# Altium PCB OpenPack_BATMOD_V2p0.PcbDoc (part 1 of 2)
Units mm, origin at the board's own origin, x right, y up, seen from the top; angles counter-clockwise.
Board outline 140 x 94 mm, 4 copper layers (Top Layer, Mid Layer 1, Mid Layer 2, Bottom Layer), stack 1.57 mm thick; 239 components, 147 nets, 762 pads, 455 vias.
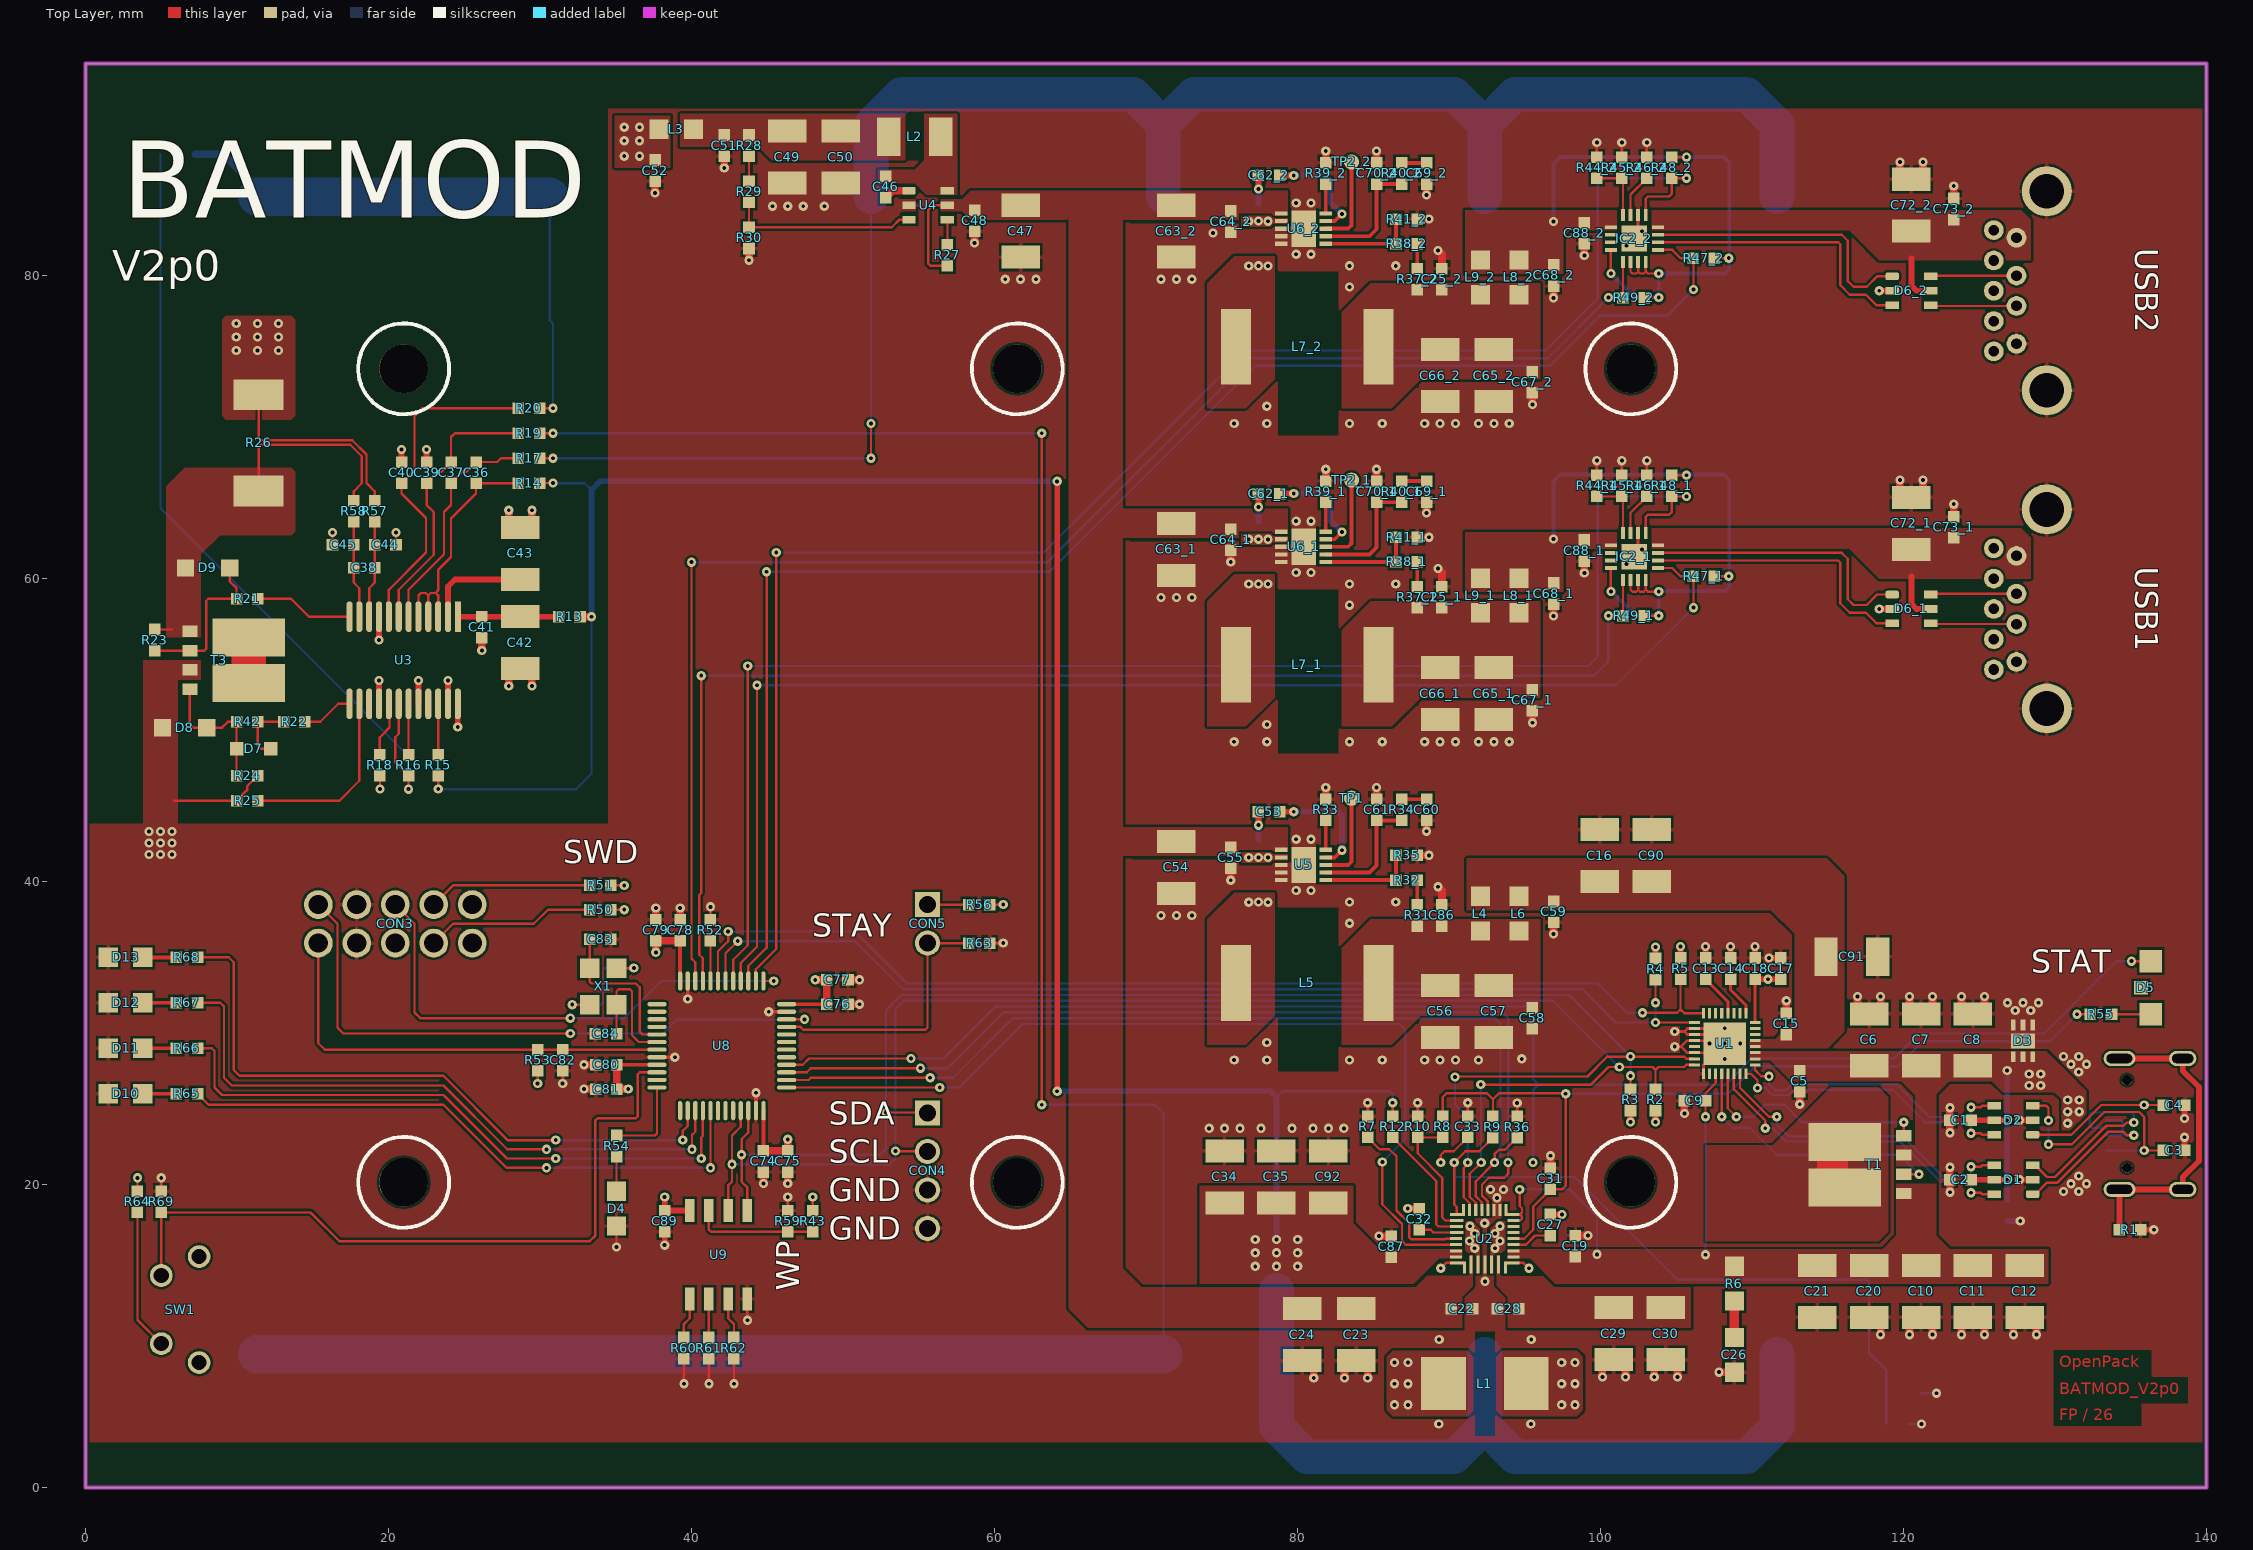
[diagram p0: Top Layer view]
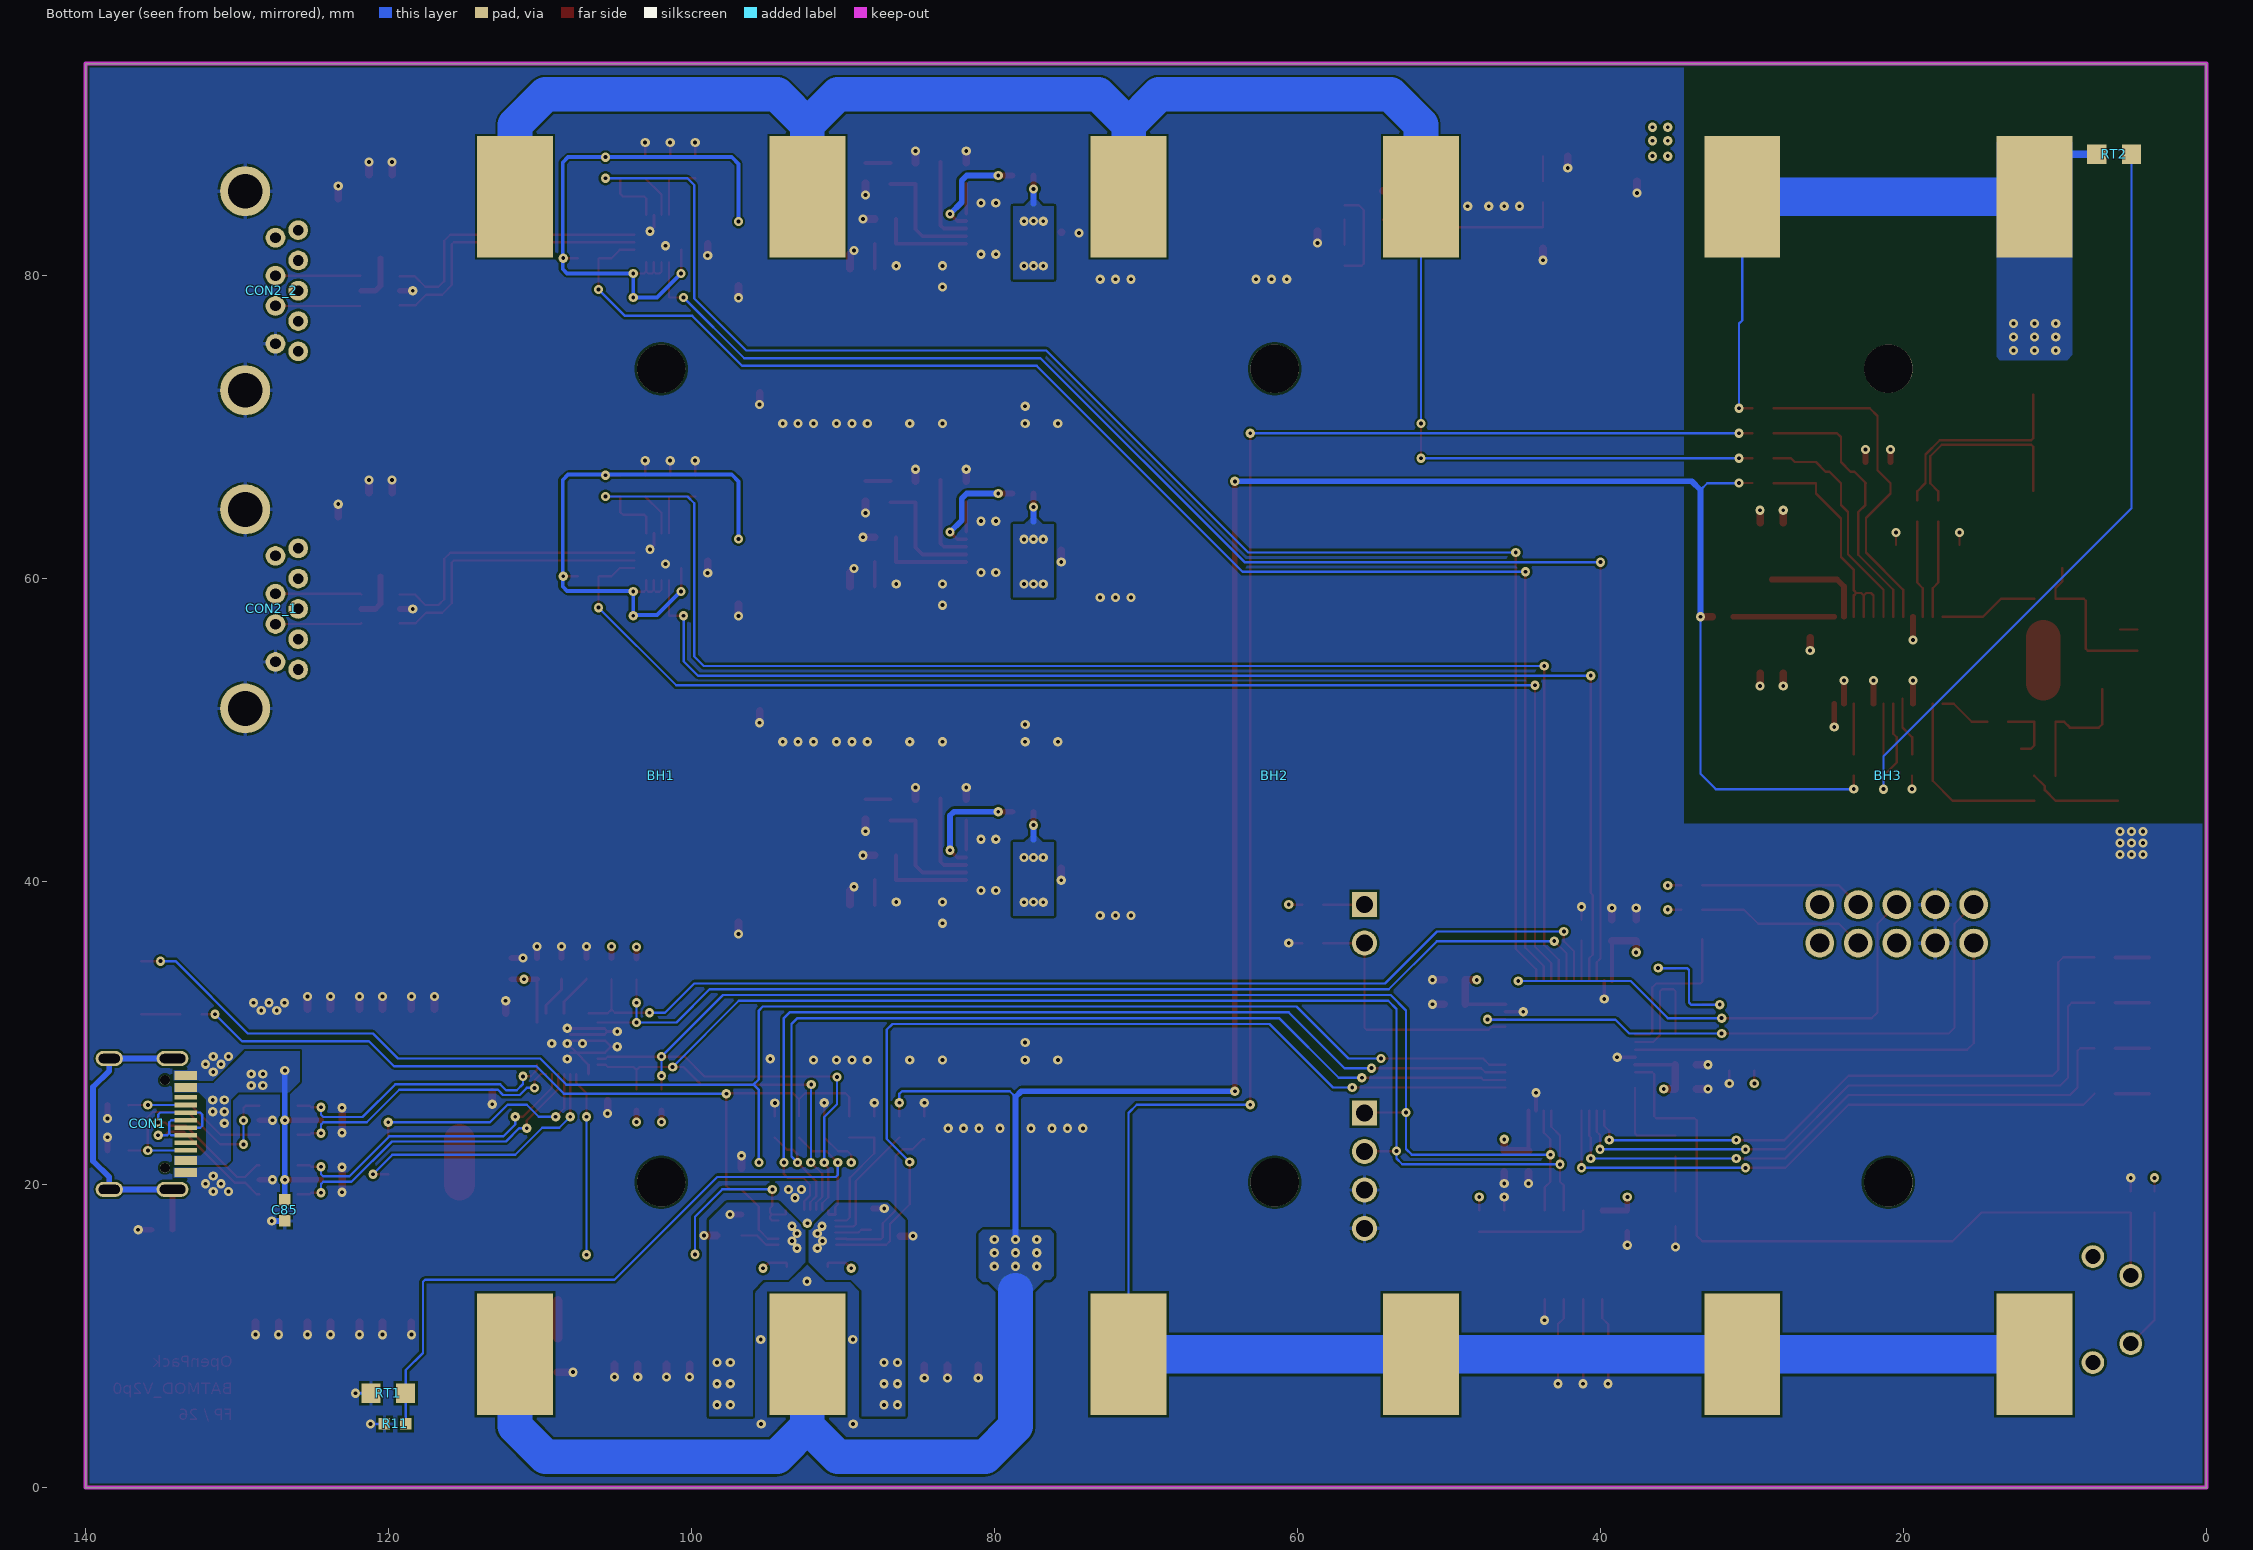
[diagram p1: Bottom Layer view, seen from below]
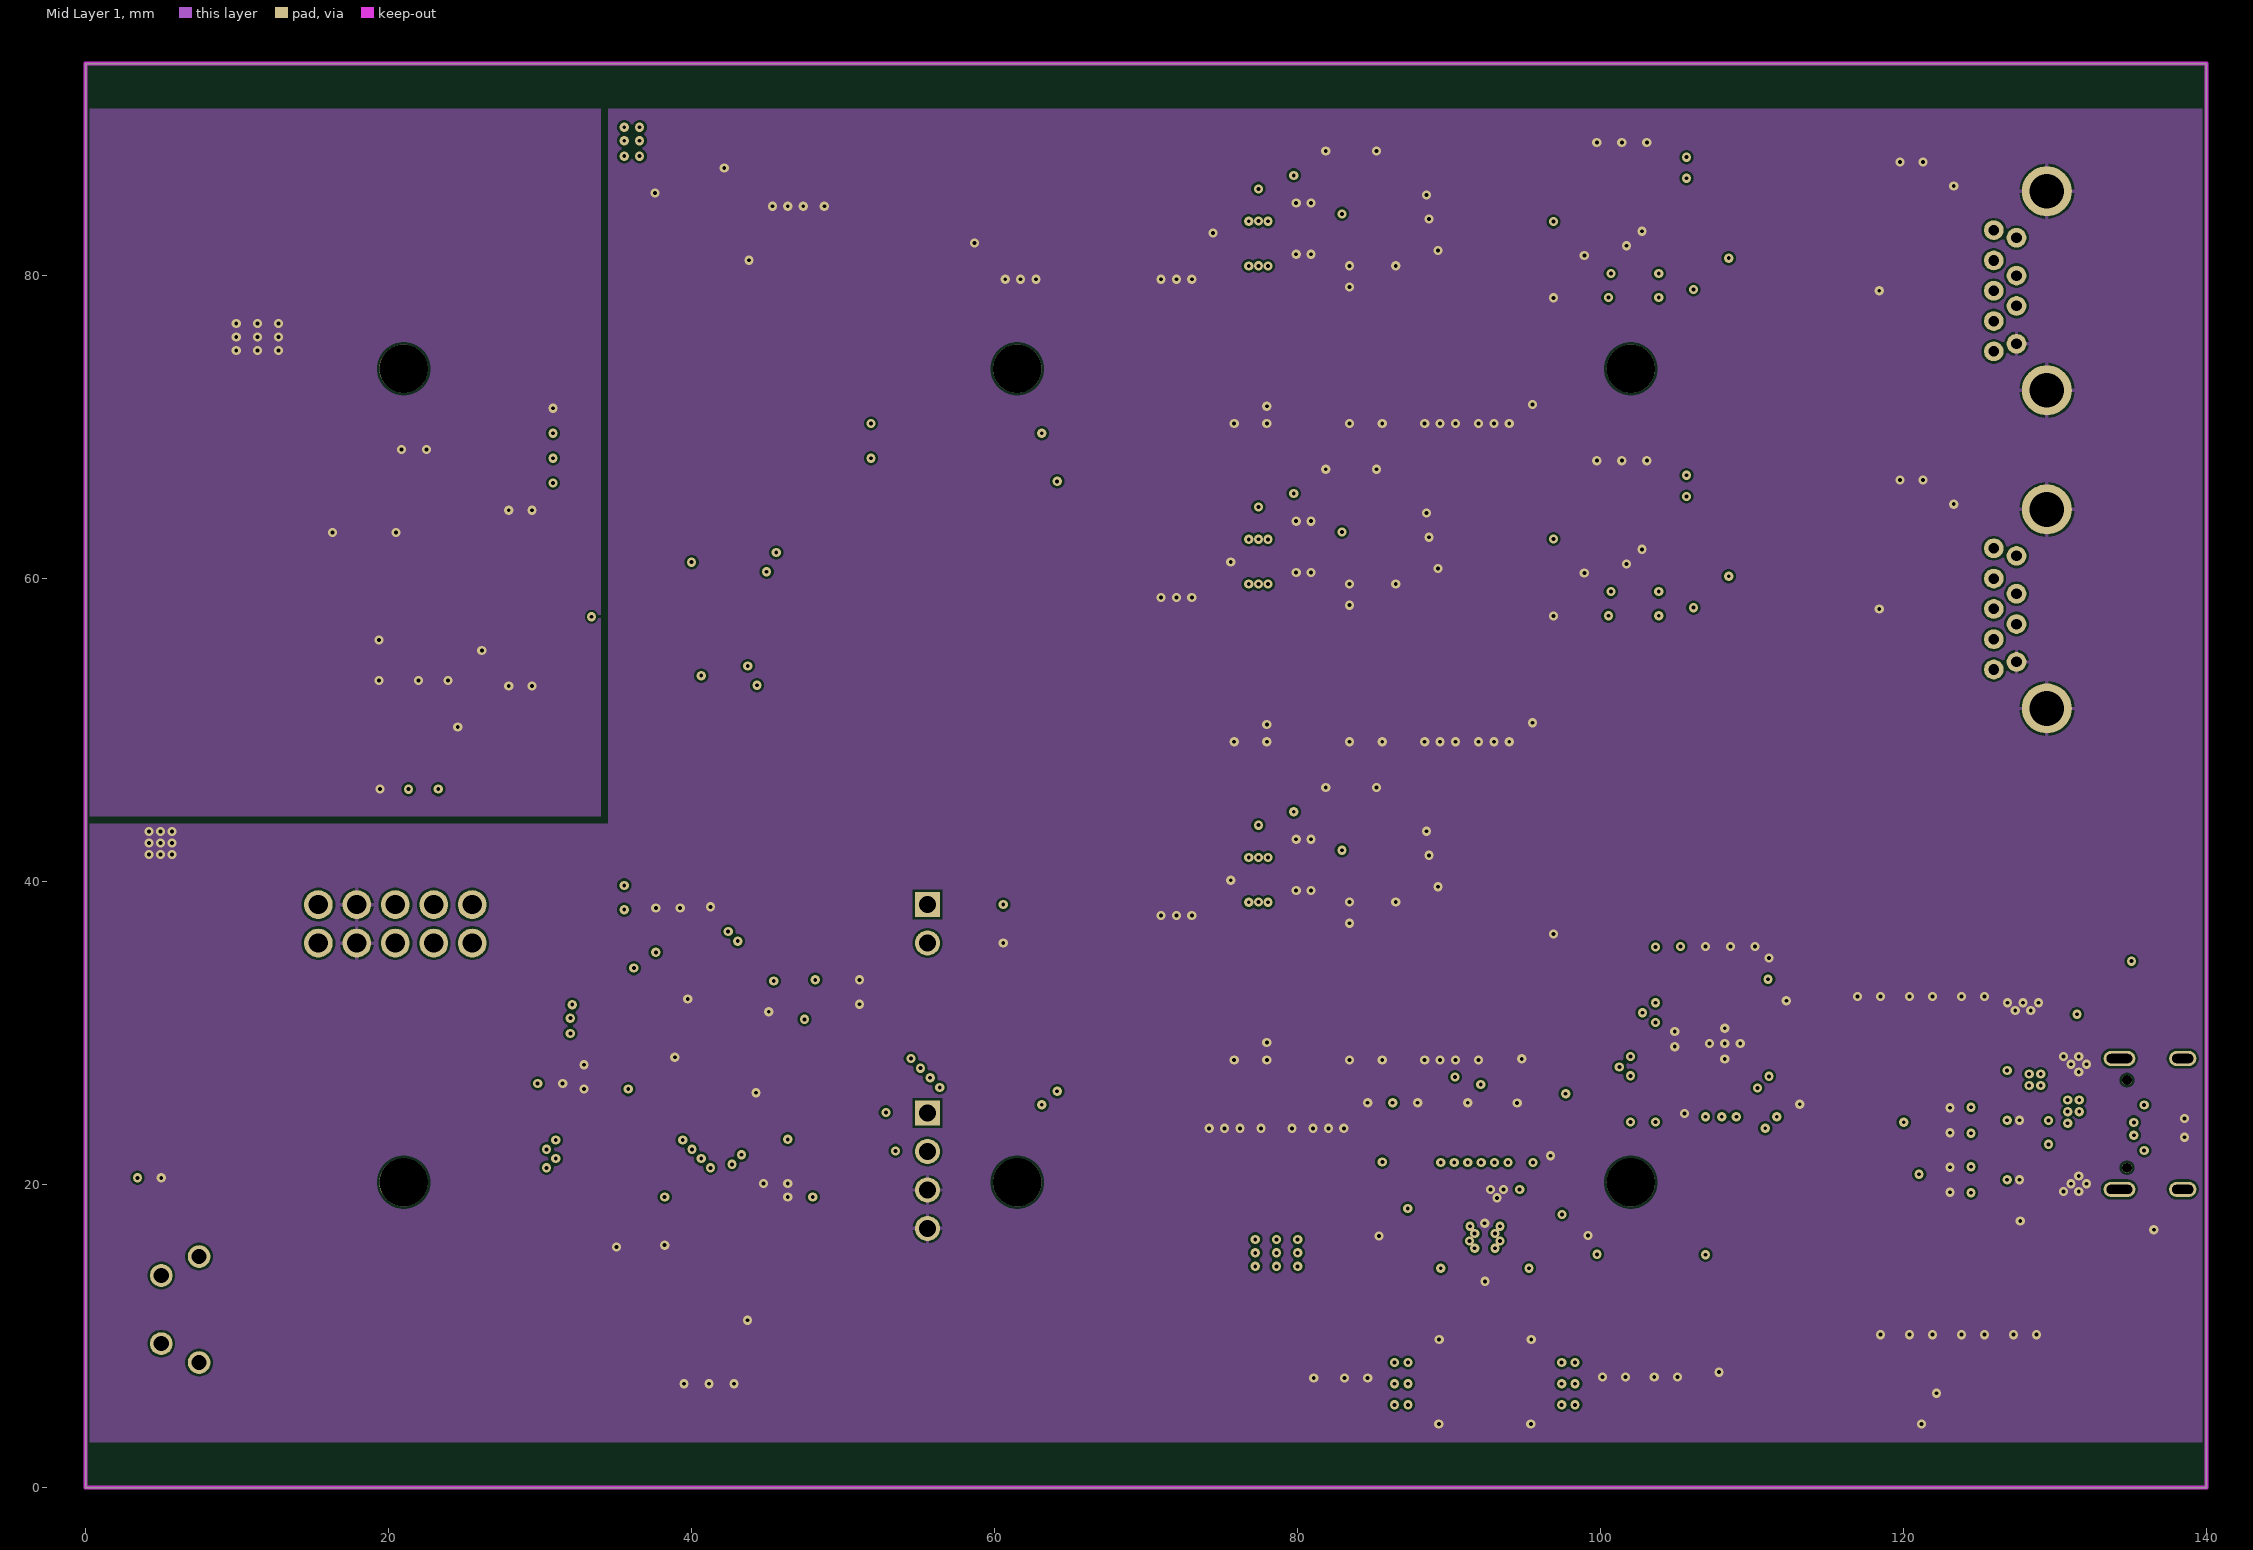
[diagram p2: Mid Layer 1]
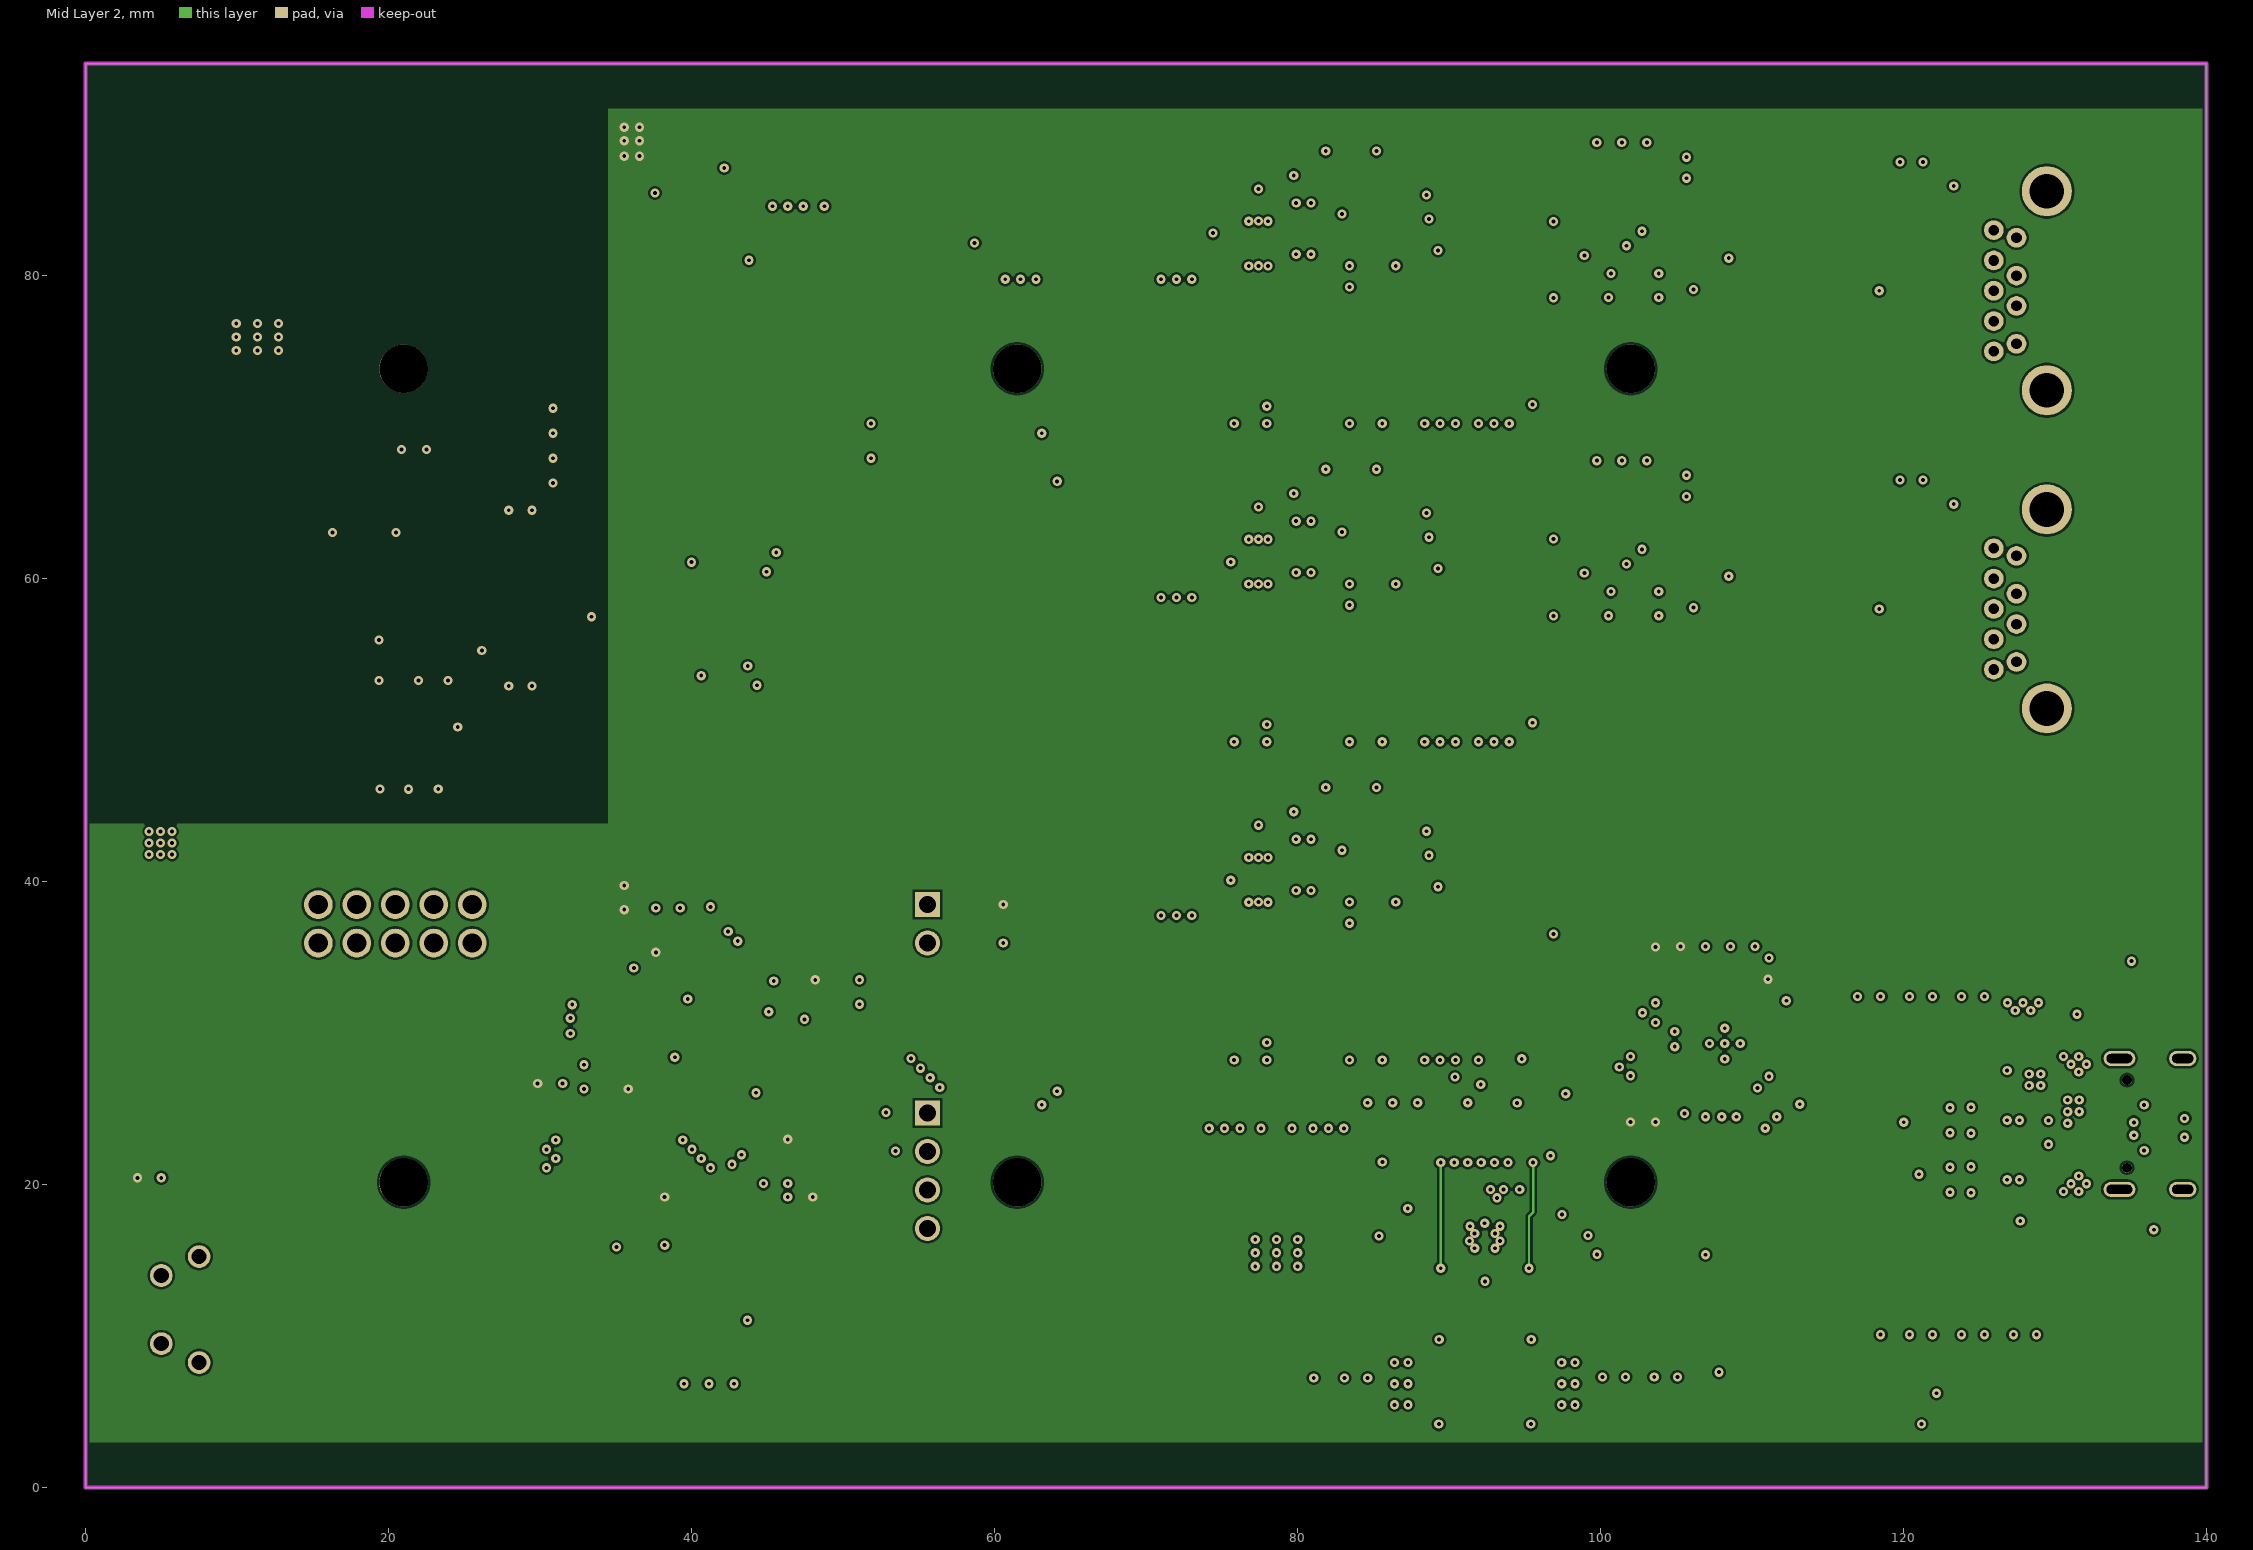
[diagram p3: Mid Layer 2]

## Layer stack, top to bottom
Top Solder: solder mask 0.0127, Solder Resist, Dk 3.8
Top Layer: signal copper 0.035
Dielectric 1: prepreg 0.1, 2313, Dk 4.05
Mid Layer 1: signal copper 0.0175
Core: core 1.265, FR-4, Dk 4.5
Mid Layer 2: signal copper 0.0175
Dielectric 2: prepreg 0.1, 2313, Dk 4.05
Bottom Layer: signal copper 0.035
Bottom Solder: solder mask 0.0127, Solder Resist, Dk 3.8

## Board outline
0,0 0,94 140,94 140,0

## Design rules (kind name [scope] priority, off if disabled: settings)
Clearance Clearance_Default [All] p1: gap=0.152 ignorepadtopadclearanceinfootprint=FALSE
HoleSize [All] p1: absolutevalues=TRUE maxlimit=3.81 minlimit=0.254 maxpercent=80.000 minpercent=20.000
MinimumSolderMaskSliver [All] p1: minsoldermaskwidth=0.025
PlaneClearance [All] p1: clearance=0.254
PlaneConnect PlaneConnect_Default [All] p1: pad.planeconnectstyle=Relief pad.reliefexpansion=0.508 pad.reliefentries=4 pad.reliefconductorwidth=0.254 pad.reliefairgap=0.152 via.planeconnectstyle=Direct via.reliefexpansion=0.508 via.reliefentries=4 via.reliefconductorwidth=0.254 via.reliefairgap=0.254
PolygonConnect PolygonConnect_Direct [IsNamedPolygon('DIRECT')] p1: connectstyle=Direct reliefconductorwidth=0.254 reliefentries=4 polygonreliefangle="90 Angle" airgapwidth=0.254
PolygonConnect PolygonConnect_Default [All] p2: thpad.connectstyle=Relief thpad.reliefconductorwidth=0.254 thpad.reliefentries=4 thpad.polygonreliefangle="90 Angle" thpad.airgapwidth=0.152 smdpad.connectstyle=Relief smdpad.reliefconductorwidth=0.254 smdpad.reliefentries=4 smdpad.polygonreliefangle="90 Angle" smdpad.airgapwidth=0.152 via.connectstyle=Direct via.reliefconductorwidth=0.254 via.reliefentries=4 via.polygonreliefangle="90 Angle" via.airgapwidth=0.254
RoutingVias RoutingVias_Default [All] p1: holewidth=0.254 width=0.61 viastyle="Through Hole" minholewidth=0.254 minwidth=0.61 maxholewidth=0.711 maxwidth=1.27
SolderMaskExpansion [All] p1: expansion=0 istentingtop=FALSE
SupplyNets "Schematic Supply Nets_4" [InNet('+3V3')] p1: voltage=0.000
SupplyNets "Schematic Supply Nets_3" [InNet('+5V')] p2: voltage=0.000
SupplyNets "Schematic Supply Nets_2" [InNet('GND')] p3: voltage=0.000
SupplyNets "Schematic Supply Nets_1" [InNet('BP_GND')] p4: voltage=0.000
Width Width_Default [All] p1: maxlimit=5.08 minlimit=0.152 preferedwidth=0.381
26 further rules are at their usual default settings.

## Classes and differential pairs
channel class OpenPack_BATMOD_V2p0_USBA: USBA1 USBA2
component class USBC: C1 C2 C3 C4 C85 CON1 D1 D2 D3 R1
component class USBA2: C25_2 C62_2 C63_2 C64_2 C65_2 C66_2 C67_2 C68_2 C69_2 C70_2 C72_2 C73_2 C88_2 CON2_2 D6_2 IC2_2 L7_2 L8_2 L9_2 R37_2 R38_2 R39_2 R40_2 R41_2 R44_2 R45_2 R46_2 R47_2 R48_2 R49_2 TP2_2 U6_2
component class USBA1: C25_1 C62_1 C63_1 C64_1 C65_1 C66_1 C67_1 C68_1 C69_1 C70_1 C72_1 C73_1 C88_1 CON2_1 D6_1 IC2_1 L7_1 L8_1 L9_1 R37_1 R38_1 R39_1 R40_1 R41_1 R44_1 R45_1 R46_1 R47_1 R48_1 R49_1 TP2_1 U6_1
component class PWR: C46 C47 C48 C49 C50 C51 C52 C53 C54 C55 C56 C57 C58 C59 C60 C61 C86 L2 L3 L4 L5 L6 R27 R28 R29 R30 R31 R32 R33 R34 R35 TP1 U4 U5
component class MCU: C74 C75 C76 C77 C78 C79 C80 C81 C82 C83 C84 C89 CON3 CON4 CON5 D4 D10 D11 D12 D13 R43 R50 R51 R52 R53 R54 R56 R59 R60 R61 R62 R63 R64 R65 R66 R67 R68 R69 SW1 U8 U9 X1
component class MAN: C5 C6 C7 C8 C9 C10 C11 C12 C13 C14 C15 C16 C17 C18 C90 C91 R2 R3 R4 R5 T1 U1
component class CHRG: C19 C20 C21 C22 C23 C24 C26 C27 C28 C29 C30 C31 C32 C33 C34 C35 C87 C92 D5 L1 R6 R7 R8 R9 R10 R11 R12 R36 R55 RT1 U2
component class BAT: BH1 BH2 BH3 C36 C37 C38 C39 C40 C41 C42 C43 C44 C45 D7 D8 D9 R13 R14 R15 R16 R17 R18 R19 R20 R21 R22 R23 R24 R25 R26 R42 R57 R58 RT2 T3 U3

## Components (designator, comment, footprint, x,y, rotation, side; value= is the part's Value field where it differs from the comment)
BH1 "12BHC186P-GR" 12BHC186P-GR 121.45,84.5 r270 bottom locked
BH2 "12BHC186P-GR" 12BHC186P-GR 42.05,9.5 r90 bottom locked
BH3 "12BHC186P-GR" 12BHC186P-GR 40.45,84.5 r270 bottom locked
C1 "100nF" CAP_0603 123.761,24.245 r0 top
C2 "100nF" CAP_0603 123.761,20.319 r0 top
C3 "330pF" CAP_0603 137.858,22.253 r180 top
C4 "330pF" CAP_0603 137.858,25.248 r180 top
C5 "100nF" CAP_0603 113.157,26.829 r90 top
C6 "10uF" CAP_1210 117.729,29.559 r270 top
C7 "10uF" CAP_1210 121.158,29.559 r270 top
C8 "10uF" CAP_1210 124.587,29.559 r270 top
C9 "100nF" CAP_0603 106.236,25.527 r0 top
C10 "10uF" CAP_1210 121.158,12.954 r90 top
C11 "10uF" CAP_1210 124.587,12.954 r90 top
C12 "10uF" CAP_1210 128.016,12.954 r90 top
C13 "10uF" CAP_0603 106.934,34.258 r270 top
C14 "10uF" CAP_0603 108.585,34.258 r270 top
C15 "100nF" CAP_0603 112.268,30.607 r270 top
C16 "47uF" CAP_1210 99.949,41.719 r270 top
C17 "100nF" CAP_0603 111.887,34.258 r270 top
C18 "10uF" CAP_0603 110.204,34.258 r270 top
C19 "100nF" CAP_0603 98.346,15.938 r270 top
C20 "10uF" CAP_1210 117.729,12.954 r90 top
C21 "10uF" CAP_1210 114.3,12.954 r90 top
C22 "100nF" CAP_0603 90.853,11.811 r180 top
C23 "10uF" CAP_1210 83.868,10.096 r90 top
C24 "10uF" CAP_1210 80.312,10.096 r90 top
C25_1 "100nF" CAP_0603 89.535,58.766 r90 top (schematic designator C25)
C25_2 "100nF" CAP_0603 89.535,79.766 r90 top (schematic designator C25)
C26 "2.2uF" CAP-0805 108.839,8.763 r90 top
C27 "47nF" CAP_0603 96.695,17.335 r270 top
C28 "100nF" CAP_0603 93.901,11.811 r0 top
C29 "10uF" CAP_1210 100.886,10.16 r90 top
C30 "10uF" CAP_1210 104.315,10.16 r90 top
C31 "10uF" CAP_0603 96.695,20.383 r270 top
C32 "47nF" CAP_0603 88.037,17.716 r90 top
C33 "1nF" CAP_0603 91.234,23.812 r270 top
C34 "10uF" CAP_1210 75.184,20.51 r270 top
C35 "10uF" CAP_1210 78.613,20.51 r270 top
C36 "100nF" CAP_0603 25.781,66.992 r270 top
C37 "100nF" CAP_0603 24.13,66.992 r270 top
C38 "100nF" CAP_0603 18.4,60.706 r0 top
C39 "100nF" CAP_0603 22.515,66.992 r270 top
C40 "100nF" CAP_0603 20.864,66.992 r90 top
C41 "100nF" CAP_0603 26.162,56.787 r90 top
C42 "10uF" CAP_1210 28.702,55.771 r90 top
C43 "10uF" CAP_1210 28.702,61.658 r270 top
C44 "100nF" CAP_0603 19.797,62.23 r180 top
C45 "100nF" CAP_0603 17.003,62.23 r0 top
C46 "100nF" CAP_0603 52.832,85.852 r270 top
C47 "10uF" CAP_1210 61.722,82.931 r90 top
C48 "100nF" CAP_0603 58.686,83.629 r270 top
C49 "47uF" CAP_1210 46.335,87.821 r90 top
C50 "47uF" CAP_1210 49.848,87.821 r90 top
C51 "100nF" CAP_0603 42.164,88.582 r270 top
C52 "100nF" CAP_0603 37.592,86.931 r270 top
C53 "100nF" CAP_0603 78.118,44.614 r0 top
C54 "10uF" CAP_1210 72.009,40.931 r90 top
C55 "100nF" CAP_0603 75.59,41.566 r270 top
C56 "47uF" CAP_1210 89.408,31.432 r90 top
C57 "47uF" CAP_1210 92.964,31.432 r90 top
C58 "100nF" CAP_0603 95.504,30.988 r270 top
C59 "100nF" CAP_0603 96.901,38.01 r270 top
C60 "10nF" CAP_0603 88.519,44.741 r270 top
C61 "120pF" CAP_0603 85.217,44.741 r90 top
C62_1 "100nF" CAP_0603 78.118,65.614 r0 top (schematic designator C62)
C62_2 "100nF" CAP_0603 78.118,86.614 r0 top (schematic designator C62)
C63_1 "10uF" CAP_1210 72.009,61.931 r90 top (schematic designator C63)
C63_2 "10uF" CAP_1210 72.009,82.931 r90 top (schematic designator C63)
C64_1 "100nF" CAP_0603 75.59,62.566 r270 top (schematic designator C64)
C64_2 "100nF" CAP_0603 75.59,83.566 r270 top (schematic designator C64)
C65_1 "47uF" CAP_1210 92.964,52.406 r90 top (schematic designator C65)
C65_2 "47uF" CAP_1210 92.964,73.406 r90 top (schematic designator C65)
C66_1 "47uF" CAP_1210 89.408,52.406 r90 top (schematic designator C66)
C66_2 "47uF" CAP_1210 89.408,73.406 r90 top (schematic designator C66)
C67_1 "100nF" CAP_0603 95.504,51.962 r270 top (schematic designator C67)
C67_2 "100nF" CAP_0603 95.504,72.961 r270 top (schematic designator C67)
C68_1 "100nF" CAP_0603 96.901,59.01 r270 top (schematic designator C68)
C68_2 "100nF" CAP_0603 96.901,80.01 r270 top (schematic designator C68)
C69_1 "10nF" CAP_0603 88.519,65.741 r270 top (schematic designator C69)
C69_2 "10nF" CAP_0603 88.519,86.741 r270 top (schematic designator C69)
C70_1 "120pF" CAP_0603 85.217,65.741 r90 top (schematic designator C70)
C70_2 "120pF" CAP_0603 85.217,86.741 r90 top (schematic designator C70)
C72_1 "47uF" CAP_1210 120.523,63.646 r270 top (schematic designator C72)
C72_2 "47uF" CAP_1210 120.523,84.645 r270 top (schematic designator C72)
C73_1 "100nF" CAP_0603 123.317,63.392 r90 top (schematic designator C73)
C73_2 "100nF" CAP_0603 123.317,84.391 r90 top (schematic designator C73)
C74 "100nF" CAP_0603 44.75,21.526 r90 top
C75 "10uF" CAP_0603 46.355,21.526 r90 top
C76 "100nF" CAP_0603 49.633,31.909 r180 top
C77 "10uF" CAP_0603 49.633,33.514 r180 top
C78 "100nF" CAP_0603 39.25,36.792 r270 top
C79 "10uF" CAP_0603 37.645,36.792 r270 top
C80 "10nF" CAP_0603 34.367,27.909 r0 top
C81 "10uF" CAP_0603 34.367,26.304 r0 top
C82 "100nF" CAP_0603 31.496,28.211 r90 top
C83 "22p / NP0" CAP_0603 33.972,36.195 r180 top
C84 "22p / NP0" CAP_0603 34.353,29.972 r0 top
C85 "100nF" CAP_0603 126.842,18.301 r90 bottom
C86 "100nF" CAP_0603 89.535,37.766 r90 top
C87 "100nF" CAP_0603 86.2,15.9 r270 top
C88_1 "10uF" CAP_0603 98.933,61.849 r90 top (schematic designator C88)
C88_2 "10uF" CAP_0603 98.933,82.804 r90 top (schematic designator C88)
C89 "100nF" CAP_0603 38.227,17.589 r90 top
C90 "47uF" CAP_1210 103.378,41.719 r270 top
C91 "10uF" CAP_1210 116.586,35.052 r180 top
C92 "10uF" CAP_1210 82.042,20.51 r270 top
CON1 "WE_629722000214" WE_629722000214 137.287,24.003 r270 bottom
CON2_1 "WE_692121030100" WE_692121030100 133,58 r270 bottom (schematic designator CON2)
CON2_2 "WE_692121030100" WE_692121030100 133,79 r270 bottom (schematic designator CON2)
CON3 "JTAG-10" CON10-2x5 15.367,35.941 r0 top
CON4 "CON4" CON4_SIMPLE_TH 55.579,24.728 r270 top
CON5 "CON2" CON2_SIMPLE_TH 55.579,38.481 r270 top
D1 "USBLC6-2SC6" SOT-23-6 127.254,20.319 r180 top
D2 "USBLC6-2SC6" SOT-23-6 127.254,24.245 r180 top
D3 "TVS2200DRVR" WSON-6 127.889,29.483 r270 top
D4 "KP-2012 SYC" KP-2012-GRN 35.052,18.415 r270 top
D5 "HSMG-C110" LED_SMD_90DEG_GRE 136,33 r270 top
D6_1 "USBLC6-2SC6" SOT-23-6 120.523,58 r0 top (schematic designator D6)
D6_2 "USBLC6-2SC6" SOT-23-6 120.523,79 r0 top (schematic designator D6)
D7 "1N4148WS" SOD-323 11.095,48.768 r180 top
D8 "BZT52C10" SOD-123F 6.604,50.165 r180 top
D9 "BZT52C10" SOD-123F 8.128,60.706 r180 top
D10 "KP-2012 SYC" KP-2012-GRN 2.643,26 r180 top
D11 "KP-2012 SYC" KP-2012-GRN 2.643,29 r180 top
D12 "KP-2012 SYC" KP-2012-GRN 2.643,32 r180 top
D13 "KP-2012 SYC" KP-2012-GRN 2.643,35 r180 top
IC2_1 "TPS2547RTER" QFN-16 102.235,61.448 r0 top (schematic designator IC2)
IC2_2 "TPS2547RTER" QFN-16 102.235,82.448 r0 top (schematic designator IC2)
L1 "1uH 8A" WE-LHMI_7030 92.366,6.858 r180 top
L2 "47uH 330mA" IND_1210 54.737,89.154 r180 top
L3 "BLM21SP" IND-0805 38.989,89.662 r180 top
L4 "WE_742792012" IND-0805 92.075,37.883 r90 top
L5 "100uH" IND_2 80.645,33.311 r90 top
L6 "WE_742792012" IND-0805 94.615,37.883 r90 top
L7_1 "100uH" IND_2 80.645,54.311 r90 top (schematic designator L7)
L7_2 "100uH" IND_2 80.645,75.311 r90 top (schematic designator L7)
L8_1 "WE_742792012" IND-0805 94.615,58.883 r90 top (schematic designator L8)
L8_2 "WE_742792012" IND-0805 94.615,79.883 r90 top (schematic designator L8)
L9_1 "WE_742792012" IND-0805 92.075,58.883 r90 top (schematic designator L9)
L9_2 "WE_742792012" IND-0805 92.075,79.883 r90 top (schematic designator L9)
R1 "100" RES-0603 134.95,17.018 r0 top
R2 "2.2k" RES-0603 103.632,25.59 r270 top
R3 "2.2k" RES-0603 101.981,25.59 r270 top
R4 "2.2k" RES-0603 103.632,34.226 r90 top
R5 "2.2k" RES-0603 105.283,34.258 r90 top
R6 "2.2" RES-0805 108.839,13.462 r90 top
R7 "10.5k" RES-0603 84.63,23.812 r90 top
R8 "110k" RES-0603 89.583,23.812 r270 top
R9 "5.1k" RES-0603 92.9,23.8 r270 top
R10 "680k" RES-0603 87.932,23.812 r90 top
R11 "31k" RES-0603 119.57,4.2 r0 bottom
R12 "100" RES-0603 86.281,23.812 r270 top
R13 "1k" RES-0603 31.94,57.485 r0 top
R14 "1k" RES-0603 29.273,66.294 r180 top
R15 "10k" RES-0603 23.275,47.688 r90 top
R16 "10k" RES-0603 21.325,47.688 r90 top
R17 "1k" RES-0603 29.273,67.945 r180 top
R18 "196k" RES-0603 19.431,47.688 r90 top
R19 "1k" RES-0603 29.273,69.596 r180 top
R20 "1k" RES-0603 29.273,71.247 r180 top
R21 "1k" RES-0603 10.668,58.674 r0 top
R22 "1k" RES-0603 13.779,50.546 r0 top
R23 "1M" RES-0603 4.572,55.943 r270 top
R24 "1M" RES-0603 10.668,46.99 r180 top
R25 "1M" RES-0603 10.668,45.339 r0 top
R26 "10mR" RES-2512 11.43,68.961 r270 top
R27 "100" RES-0603 56.896,81.343 r270 top
R28 "22k" RES-0603 43.795,88.583 r90 top
R29 "47k" RES-0603 43.795,85.535 r90 top
R30 "22k" RES-0603 43.795,82.487 r90 top
R31 "10k" RES-0603 87.9,37.766 r270 top
R32 "100k" RES-0603 87.202,40.099 r0 top
R33 "100k" RES-0603 81.868,44.741 r270 top
R34 "3.3k" RES-0603 86.868,44.741 r270 top
R35 "20k" RES-0603 87.202,41.734 r180 top
R36 "0" RES-0603 94.5,23.8 r90 top
R37_1 "10k" RES-0603 87.9,58.766 r270 top (schematic designator R37)
R37_2 "10k" RES-0603 87.9,79.766 r270 top (schematic designator R37)
R38_1 "100k" RES-0603 87.202,61.099 r0 top (schematic designator R38)
R38_2 "100k" RES-0603 87.202,82.099 r0 top (schematic designator R38)
R39_1 "100k" RES-0603 81.868,65.741 r270 top (schematic designator R39)
R39_2 "100k" RES-0603 81.868,86.741 r270 top (schematic designator R39)
R40_1 "3.3k" RES-0603 86.868,65.741 r270 top (schematic designator R40)
R40_2 "3.3k" RES-0603 86.868,86.741 r270 top (schematic designator R40)
R41_1 "20k" RES-0603 87.202,62.734 r180 top (schematic designator R41)
R41_2 "20k" RES-0603 87.202,83.734 r180 top (schematic designator R41)
R42 "1M" RES-0603 10.668,50.546 r0 top
R43 "dnm" RES-0603 48.006,17.589 r270 top
R44_1 "51k" RES-0603 99.758,66.121 r270 top (schematic designator R44)
R44_2 "51k" RES-0603 99.758,87.121 r270 top (schematic designator R44)
R45_1 "51k" RES-0603 101.409,66.121 r270 top (schematic designator R45)
R45_2 "51k" RES-0603 101.409,87.121 r270 top (schematic designator R45)
R46_1 "dnm" RES-0603 103.06,66.121 r270 top (schematic designator R46)
R46_2 "dnm" RES-0603 103.06,87.121 r270 top (schematic designator R46)
R47_1 "10k" RES-0603 106.807,60.153 r0 top (schematic designator R47)
R47_2 "10k" RES-0603 106.807,81.153 r0 top (schematic designator R47)
R48_1 "10k" RES-0603 104.712,66.121 r90 top (schematic designator R48)
R48_2 "10k" RES-0603 104.712,87.121 r90 top (schematic designator R48)
R49_1 "10k" RES-0603 102.184,57.549 r0 top (schematic designator R49)
R49_2 "10k" RES-0603 102.184,78.549 r0 top (schematic designator R49)
R50 "22" RES-0603 33.972,38.147 r180 top
R51 "22" RES-0603 33.972,39.751 r0 top
R52 "10k" RES-0603 41.25,36.792 r90 top
R53 "10k" RES-0603 29.845,28.211 r270 top
R54 "220R" RES-0603 35.052,22.542 r270 top
R55 "120" RES-0603 133.032,31.242 r0 top
R56 "220R" RES-0603 58.991,38.481 r0 top
R57 "100" RES-0603 19.098,64.452 r270 top
R58 "100" RES-0603 17.701,64.452 r270 top
R59 "10k" RES-0603 46.355,17.589 r270 top
R60 "10k" RES-0603 39.497,9.207 r90 top
R61 "10k" RES-0603 41.148,9.207 r90 top
R62 "10k" RES-0603 42.799,9.207 r90 top
R63 "10k" RES-0603 58.991,35.941 r180 top
R64 "220R" RES-0603 3.429,18.859 r90 top
R65 "220R" RES-0603 6.699,26 r180 top
R66 "220R" RES-0603 6.699,29 r180 top
R67 "220R" RES-0603 6.699,32 r180 top
R68 "220R" RES-0603 6.699,35 r180 top
R69 "10k" RES-0603 5,18.859 r270 top
RT1 "NTCS0805E3103FLT" RES-0805 120.015,6.223 r180 bottom
RT2 "NTCS0805E3103FLT" RES-0805 6.096,88.011 r180 bottom
SW1 "431256031726" 4312560317x6 4.125,11.75 r270 top
T1 "NVMFD5877NLWFT1G-UM" "SO-8FL (DFN8)" 117.221,21.32 r90 top
T3 "NVMFD5877NLWFT1G-UM" "SO-8FL (DFN8)" 9.683,54.61 r270 top
TP1 "TESTPOINT" TESTPOINT1MM 83.566,45.503 r0 top
TP2_1 "TESTPOINT" TESTPOINT1MM 83.566,66.503 r90 top (schematic designator TP2)
TP2_2 "TESTPOINT" TESTPOINT1MM 83.566,87.503 r90 top (schematic designator TP2)
U1 "TPS25751SRSMR" "QFN32 - 0.4mm" 108.204,29.305 r270 top
U2 "BQ25798RQMR" "QFN 29" 92.366,16.432 r180 top
U3 "BQ7791500PWT" TSSOP24 21,54.61 r270 top
U4 "LMR51403YDBVR" SOT-23-6 55.626,84.645 r0 top
U5 "TPS54335A" VSON-10 80.406,41.099 r0 top
U6_1 "TPS54335A" VSON-10 80.406,62.099 r0 top (schematic designator U6)
U6_2 "TPS54335A" VSON-10 80.406,83.099 r0 top (schematic designator U6)
U8 "STM32F103C8T6TR" LQFP48_L 42,29.159 r0 top
U9 "CAT24C256WI-GT3" SOIC8 41.783,15.367 r90 top
X1 "16MHz" XTAL-32x25 34.163,33.147 r270 top

## Footprints (in the part's own frame and the unit in brackets; to place one, negate y for a bottom-side part, rotate by r counter-clockwise, add the part's x,y. Pads: shape width x height; smd on the part's side, far side on the other; paste and mask are expansions set on the pad)
12BHC186P-GR [mm]
  round 3.2 hole 3.2 unplated: 0(10.65,19.45) 0(64.35,19.45)
  rect 8x5 smd: 1(-0.7,29.1) 2(75.7,29.1) 3(-0.7,9.8) 4(75.7,9.8)
  body extent -0.5,-1 75.5,40, height 21
4312560317x6 [mm]
  round 1.5 hole 1: 1(-2.25,0.875) 2(2.25,0.875) G1(-3.5,3.375) G2(3.5,3.375)
  body extent -4.2,-2.27 4.2,4.88, height 7.25
CAP-0805 [mil]
  rect 50x50 smd: 1(-45,0) 2(45,0)
  body extent -39,-25 39,25, height 24
CAP_0603 [mil]
  rect 30x30 smd: 1(-27.5,0) 2(27.5,0)
  body extent -31,-16 31,16, height 22
CAP_1210 [mil]
  rect 60x100 smd paste-2: 1(-67.5,0) 2(67.5,0)
  body extent -79,-49 79,49, height 67
CON2_SIMPLE_TH [mil]
  rect 65x65 hole 44: 1(0,0)
  round 65 hole 44: 2(100,0)
CON4_SIMPLE_TH [mil]
  rect 65x65 hole 44: 1(0,0)
  round 65 hole 44: 2(100,0) 3(200,0) 4(300,0)
CON10-2x5 [mm]
  round 1.905 hole 1.27: 1(0,0) 2(0,2.54) 3(2.54,0) 4(2.54,2.54) 5(5.08,0) 6(5.08,2.54) 7(7.62,0) 8(7.62,2.54) 9(10.16,0) 10(10.16,2.54)
  body extent -5.12,-3.23 15.28,5.77, height 9
IND-0805 [mil]
  rect 50x50 smd: 1(-45,0) 2(45,0)
  body extent -34,-19 34,19, height 37
IND_2 [mm]
  rect 5x2 smd: 1(0,4.7) 2(0,-4.7)
  body extent -5.1,-5.15 5.1,5.15, height 3.9
IND_1210 [mil]
  rect 60x100 smd paste-2: 1(-67.5,0) 2(67.5,0)
  body extent -66,-49 66,49, height 91
KP-2012-GRN [mil]
  rect 50x50 smd: 1(-45,0) 2(45,0)
  body extent -39,-25 39,25, height 43
LED_SMD_90DEG_GRE [mm]
  rect 1.5x1.5 smd: A(1.75,0.325) K(-1.75,0.325)
  rect 0.9x0.9 smd: x(0,-0.325)
  body extent -1.5,-0.15 1.5,1.85, height 1.02
LQFP48_L [mm]
  oval 1.27x0.279 smd: 1(-4.279,2.75) 2(-4.279,2.25) 3(-4.279,1.75) 4(-4.279,1.25) 5(-4.279,0.75) 6(-4.279,0.25) 7(-4.279,-0.25) 8(-4.279,-0.75) 9(-4.279,-1.25) 10(-4.279,-1.75) 11(-4.279,-2.25) 12(-4.279,-2.75) 25(4.279,-2.75) 26(4.279,-2.25) 27(4.279,-1.75) 28(4.279,-1.25) 29(4.279,-0.75) 30(4.279,-0.25) 31(4.279,0.25) 32(4.279,0.75) 33(4.279,1.25) 34(4.279,1.75) 35(4.279,2.25) 36(4.279,2.75)
  oval 0.279x1.27 smd: 13(-2.75,-4.279) 14(-2.25,-4.279) 15(-1.75,-4.279) 16(-1.25,-4.279) 17(-0.75,-4.279) 18(-0.25,-4.279) 19(0.25,-4.279) 20(0.75,-4.279) 21(1.25,-4.279) 22(1.75,-4.279) 23(2.25,-4.279) 24(2.75,-4.279) 37(2.75,4.279) 38(2.25,4.279) 39(1.75,4.279) 40(1.25,4.279) 41(0.75,4.279) 42(0.25,4.279) 43(-0.25,4.279) 44(-0.75,4.279) 45(-1.25,4.279) 46(-1.75,4.279) 47(-2.25,4.279) 48(-2.75,4.279)
  body extent -4.5,-4.5 4.5,4.5, height 1.56
"QFN32 - 0.4mm" [mm]
  rect 0.7x0.2 smd: 1(-2,1.4) 2(-2,1) 3(-2,0.6) 4(-2,0.2) 5(-2,-0.2) 6(-2,-0.6) 7(-2,-1) 8(-2,-1.4) 17(2,-1.4) 18(2,-1) 19(2,-0.6) 20(2,-0.2) 21(2,0.2) 22(2,0.6) 23(2,1) 24(2,1.4)
  rect 0.2x0.7 smd: 9(-1.4,-2) 10(-1,-2) 11(-0.6,-2) 12(-0.2,-2) 13(0.2,-2) 14(0.6,-2) 15(1,-2) 16(1.4,-2) 25(1.4,2) 26(1,2) 27(0.6,2) 28(0.2,2) 29(-0.2,2) 30(-0.6,2) 31(-1,2) 32(-1.4,2)
  rect 2.8x2.8 smd: 33(0,0)
  body extent -2.05,-2.05 2.05,2.05, height 1
"QFN 29" [mm]
  rect 0.95x0.2 smd: 1(-1.825,1.6) 24(1.825,1.6)
  rect 0.2x0.8 smd: 1(-1.35,1.9) 9(-1.4,-1.9) 10(-1,-1.9) 11(-0.6,-1.9) 12(-0.2,-1.9) 13(0.2,-1.9) 14(0.6,-1.9) 15(1,-1.9) 16(1.4,-1.9) 24(1.35,1.9)
  rect 0.8x0.2 smd: 2(-1.9,1.2) 3(-1.9,0.8) 4(-1.9,0.4) 5(-1.9,0) 6(-1.9,-0.4) 7(-1.9,-0.8) 8(-1.9,-1.2) 20(1.9,0) 21(1.9,0.4) 22(1.9,0.8) 23(1.9,1.2)
  rect 0.9x0.2 smd: 9(-1.85,-1.6) 16(1.853,-1.6) 17(1.85,-1.2)
  rect 0.85x0.2 smd: 18(1.875,-0.8)
  rect 0.88x0.2 smd: 19(1.86,-0.4)
  rect 0.2x1.2 smd: 25(0.9,1.7) 26(0.45,1.7) 27(0,1.7) 28(-0.45,1.7) 29(-0.9,1.7)
  body extent -2,-2 2,2, height 1
QFN-16 [mm]
  rect 0.8x0.25 smd: 1(-1.55,0.75) 2(-1.55,0.25) 3(-1.55,-0.25) 4(-1.55,-0.75) 9(1.55,-0.75) 10(1.55,-0.25) 11(1.55,0.25) 12(1.55,0.75)
  rect 0.25x0.8 smd: 5(-0.75,-1.55) 6(-0.25,-1.55) 7(0.25,-1.55) 8(0.75,-1.55) 13(0.75,1.55) 14(0.25,1.55) 15(-0.25,1.55) 16(-0.75,1.55)
  rect 1.7x1.7 smd: 17(0,0)
  body extent -1.5,-1.5 1.5,1.5, height 0.9
RES-0603 [mil]
  rect 30x30 smd: 1(-27.5,0) 2(27.5,0)
  body extent -31,-16 31,16, height 18
RES-0805 [mil]
  rect 50x50 smd: 1(-45,0) 2(45,0)
  body extent -45,-27 45,27, height 30
RES-2512 [mil]
  rect 80x130 smd: 1(-125,0) 2(125,0)
  body extent -126,-63 126,63, height 28
"SO-8FL (DFN8)" [mm]
  rect 0.75x1 smd: 1(-1.905,-2.795) 2(-0.635,-2.795) 3(0.635,-2.795) 4(1.905,-2.795)
  rect 2.5x4.8 smd: 9(-1.5,1.1) 10(1.5,1.1)
  body extent -2.58,-3 2.57,3.18, height 1.13
SOD-123F [mil]
  rect 45x45 smd: 1(60,0) 2(-55,0)
  body extent -72,-33 76,33, height 47
SOD-323 [mil]
  rect 35x35 smd paste-2: 1(-44.29,0) 2(44.29,0)
  body extent -51,-27 51,27, height 44
SOIC8 [mil]
  rect 60x25 smd: 1(-115,75) 2(-115,25) 3(-115,-25) 4(-115,-75) 5(115,-75) 6(115,-25) 7(115,25) 8(115,75)
  body extent -118,-96 118,96, height 69
SOT-23-6 [mil]
  rrect50% 35x20 smd: 1(-50,37.4)
  rect 35x20 smd: 2(-50,0.01) 3(-50,-37.4) 4(50,-37.4) 5(50,0.01) 6(50,37.4)
  body extent -48,-55 48,55, height 43
TESTPOINT1MM [mm]
  round 1 smd: 0(0,0)
TSSOP24 [mm]
  rect 2.032x0.4 smd paste+0 mask+0.051: 1(-2.875,3.575)
  rrect100% 2.032x0.4 smd paste+0 mask+0.051: 2(-2.875,2.925) 3(-2.875,2.275) 4(-2.875,1.625) 5(-2.875,0.975) 6(-2.875,0.325) 7(-2.875,-0.325) 8(-2.875,-0.975) 9(-2.875,-1.625) 10(-2.875,-2.275) 11(-2.875,-2.925) 12(-2.875,-3.575) 13(2.875,-3.575) 14(2.875,-2.925) 15(2.875,-2.275) 16(2.875,-1.625) 17(2.875,-0.975) 18(2.875,-0.325) 19(2.875,0.325) 20(2.875,0.975) 21(2.875,1.625) 22(2.875,2.275) 23(2.875,2.925) 24(2.875,3.575)
  body extent -3.2,-3.9 3.2,3.9, height 1.2
VSON-10 [mm]
  rect 0.825x0.28 smd mask+0.07: 1(-1.462,1) 2(-1.462,0.5) 3(-1.462,0) 4(-1.462,-0.5) 5(-1.462,-1) 6(1.463,-1) 7(1.463,-0.5) 8(1.463,0) 9(1.463,0.5) 10(1.463,1)
  rect 1.6x2.4 smd paste-5: EXP(0,0)
  body extent -1.58,-1.58 1.57,1.57, height 1
WE-LHMI_7030 [mm] "SMT Power Inductor, 2-Leads, body 6.6x6.6mm"
  rect 2.95x3.5 smd: 1(-2.725,0) 2(2.725,0)
  body extent -3.65,-3.3 3.65,3.3, height 2.8
WE_629722000214 [mm] "USB TYPE C VERTICAL PLUG"
  rect 0.6x1.5 smd: A1/B12(-3.2,3.905) A4/B9(-2.4,3.905) A9/B4(2.4,3.905) A12/B1(3.2,3.905)
  rect 0.3x1.5 smd: A5(-1.25,3.905) A6(-0.25,3.905) A7(0.25,3.905) A8(1.25,3.905) B5(1.75,3.905) B6(0.75,3.905) B7(-0.75,3.905) B8(-1.75,3.905)
  round 0.65 hole 0.65 unplated: MH1(-2.89,2.535) MH2(2.89,2.535)
  oval 1x1.8 hole 0.6 slot 1.4 at 90 deg: Shell(-4.32,-1.145) Shell(4.32,-1.145)
  oval 1x2.1 hole 0.6 slot 1.7 at 90 deg: Shell(-4.32,3.035) Shell(4.32,3.035)
  body extent -4.79,-3.76 4.79,3.95, height 3.33
WE_692121030100 [mm]
  round 1.3 hole 0.7: 1(-3.5,5.54) 2(-1,5.54) 3(1,5.54) 4(3.5,5.54) 5(4,7.04) 6(2,7.04) 7(0,7.04) 8(-2,7.04) 9(-4,7.04)
  round 3.3 hole 2.3: Shell(-6.57,3.54) Shell(6.57,3.54)
  body extent -7.74,-8.24 7.74,8.31, height 8.07
WSON-6 [mm]
  rect 0.7x0.3 smd paste-0.025 mask+0.07: 1(-1.05,0.65) 2(-1.05,0) 3(-1.05,-0.65) 4(1.05,-0.65) 5(1.05,0) 6(1.05,0.65)
  rect 1x1.6 smd paste-0.1 mask+0.07: 7(0,0)
  body extent -1.01,-1 1.01,1, height 0.8
XTAL-32x25 [mm]
  rect 1.3x1.3 smd: 1(-1.143,-0.889) 2(1.27,-0.889) 3(1.27,0.889) 4(-1.143,0.889)
  body extent -1.6,-1.25 1.6,1.25, height 0.83

## Part data
BH1 BH2 BH3: "Battery holder, 2x18650", ComponentLink1Description=Order, ComponentLink2Description=Datasheet, ComponentLink2URL=https://hu.mouser.com/en/ProductDetail/Eagle-Plastic-Devices/12BHC186P-GR?qs=AQlKX63v8Rv70Ee1H7gwgg%3D%3D, Part Number=12BHC186P-GR, Supplier=Mouser, Type=MECH
C1 C2 C3 C4 C5 C9 C13 C14 C15 C17 C18 C19 C22 C25_1 C25_2 C26 C27 C28 C31 C32 C33 C36 C37 C38 C39 C40 C41 C44 C45 C46 C48 C51 C52 C53 C55 C58 C59 C60 C61 C62_1 C62_2 C64_1 C64_2 C67_1 C67_2 C68_1 C68_2 C69_1 C69_2 C70_1 C70_2 C73_1 C73_2 C74 C75 C76 C77 C78 C79 C80 C81 C82 C83 C84 C85 C86 C87 C88_1 C88_2 C89: library part NP-CAPACITOR, "MLCC capacitor", Type=CAP
C6 C7 C8 C10 C11 C12 C20 C21 C23 C24 C29 C30 C34 C35 C42 C43 C47 C54 C63_1 C63_2 C91 C92: library part NP-CAPACITOR, "UMK325BJ106KM-P", Part Number=810-CGA6P1X7R1N106K2, Supplier=Mouser, Type=CAP
C16 C49 C50 C56 C57 C65_1 C65_2 C66_1 C66_2 C72_1 C72_2 C90: library part NP-CAPACITOR, "Np-Cap", Part Number=80-C1210C476M4P, Supplier=Mouser, Type=CAP
CON1: "USB Connectors WR-COM Receptacle USB 2.0 Type C Horizontal SMT 16 pins- PCB Thickness 0.8mm", Part Number=710-629722000214, ComponentLink1Description=Datasheet, ComponentLink2Description=Order, ComponentLink2URL=https://hu.mouser.com/en/ProductDetail/Wurth-Elektronik/629722000214?qs=1Kr7Jg1SGW93XYhc8K3hvA%3D%3D, Supplier=Mouser, Type=CON?
CON2_1 CON2_2: "USB Connectors WR-COM 3.0 TypeA SMT 9Pin Horztl Female", Part Number=710-692121030100, ComponentLink1Description=Datasheet, ComponentLink2Description=Order, ComponentLink2URL=https://hu.mouser.com/en/ProductDetail/Wurth-Elektronik/692121030100?qs=e5m3IbTHPW%252BzU%252B9ZpCsp%2Fg%3D%3D, Supplier=Mouser, Type=IC
CON3: library part JTAG, "JTAG programing connector, 10pin", Part Number=100.261.60, ComponentLink1Description=Datasheet, ComponentLink1URL=ZL231-10PG_EN_10026160.pdf, ComponentLink2Description=Order, ComponentLink2URL=https://www.hestore.hu/prod_10026160.html, Supplier=Hestore, Type=CON
CON4: "Simple 4pin THT, 2.54mm"
CON5: "Simple 2pin THT, 2.54mm"
D1 D2 D6_1 D6_2: "ESD Protection Diodes / TVS Diodes ESD Protection Low Cap", Part Number=511-USBLC6-2SC6, ComponentLink1Description=Datasheet, ComponentLink2Description=Order, ComponentLink2URL=https://hu.mouser.com/en/ProductDetail/STMicroelectronics/USBLC6-2SC6?qs=po45yt2pPpu%2FhNIlwQdTlg%3D%3D, Supplier=Mouser, Type=Diode
D3: "ESD Protection Diodes / TVS Diodes 22V flat-clamp surge protection device 6", Part Number=595-TVS2200DRVR, ComponentLink1Description=Datasheet, ComponentLink2Description=Order, ComponentLink2URL=https://hu.mouser.com/en/ProductDetail/Texas-Instruments/TVS2200DRVR?qs=W0yvOO0ixfHPbvei2cYdIw%3D%3D, Supplier=Mouser, Type=Diode
D4 D10 D11 D12 D13: "Yellow LED", Part Number=100.290.81, ComponentLink1Description=Datasheet, ComponentLink1URL=KP-2012SYC_EN_10029081.pdf, ComponentLink2Description=Order, ComponentLink2URL=https://www.hestore.hu/prod_10029081.html, Supplier=Hestore, Type=Diode
D5: "Green LED, 90deg", Part Number=630-HSMG-C110, ComponentLink1Description=Datasheet, ComponentLink1URL=AV02_0551EN_DS_HSMx_Cxxx.pdf, ComponentLink2Description=Order, ComponentLink2URL=https://hu.mouser.com/ProductDetail/Broadcom-Avago/HSMG-C110?qs=YDL0qNrpDT4yGVa8S%252B44dw%3D%3D, Supplier=Mouser, Type=Diode
D7: "Small Signal Diode, 75V, 150mA", Part Number=2453269, ComponentLink1Description=Datasheet, ComponentLink1URL=ONSM-S-A0013042080-1.pdf, ComponentLink2Description=Order, ComponentLink2URL=https://hu.farnell.com/on-semiconductor/1n4148ws/diode-small-signal-75v-sod-323f/dp/2453269?ost=2453269, Supplier=Farnell, Type=Diode
D8 D9: "Zener diode 10V 0.5W", Part Number=100.399.09, ComponentLink1Description=Datasheet, ComponentLink1URL=BZT52C10_EN_10039909.pdf, ComponentLink2Description=Order, ComponentLink2URL=https://www.hestore.hu/prod_10039909.html, Supplier=Hestore, Type=Diode
IC2_1 IC2_2: "USB Switch ICs USB charging port co ntroller and 3A pow A 595-TPS2547RTET", Part Number=595-TPS2547RTER, ComponentLink1Description=Datasheet, ComponentLink2Description=Order, ComponentLink2URL=https://hu.mouser.com/en/ProductDetail/Texas-Instruments/TPS2547RTER?qs=sGAEpiMZZMutXGli8Ay4kLXLEI0dbCtTlAK%2FeCGBCiY%3D, Supplier=Mouser, Type=IC
L1: library part "Inductance - 1uH", "Ferrit core coil, 1uH 8A, 10mR", Part Number=710-74437346010, ComponentLink1Description=Datasheet, ComponentLink2Description=Order, ComponentLink2URL=https://hu.mouser.com/en/ProductDetail/Wurth-Elektronik/74437346010?qs=cFlH0mFHHFoJDXer0S4nbw%3D%3D, Supplier=Mouser, Type=IND
L2: library part "Inductance - 47uH", "Power inductor", Part Number=81-LQH32PN470MN0L, ComponentLink1Description=Datasheet, ComponentLink2Description=Order, ComponentLink2URL=https://hu.mouser.com/en/ProductDetail/Murata-Electronics/LQH32PN470MN0L?qs=18WYLvqSxErKIEyluVLVKQ%3D%3D, Supplier=Mouser, Type=IND
L3: library part BLM21SP102SN1D, "Chip Ferrite Bead, 1000R @100MHz, 1.6A", Part Number=81-BLM21SP102SN1D, ComponentLink1Description=Datasheet, ComponentLink1URL=ENFA0005-1915781.pdf, ComponentLink2Description=Order, ComponentLink2URL=https://hu.mouser.com/ProductDetail/Murata-Electronics/BLM21SP102SN1D?qs=17u8i%2FzlE88oj6hmj%252BXptA%3D%3D, Supplier=Mouser, Type=IND
L4 L6 L8_1 L8_2 L9_1 L9_2: "Chip Ferrite Bead, 33R @100MHz, 4A", Part Number=710-742792012, ComponentLink1Description=Datasheet, ComponentLink2Description=Order, ComponentLink2URL=https://hu.mouser.com/en/ProductDetail/Wurth-Elektronik/742792012?qs=J4sk5G6CMwb1B4GP%2Fe%2FxmA%3D%3D, Supplier=Mouser, Type=IND
L5 L7_1 L7_2: library part "Inductance - 22uH", "Ferrit core coil, 22uH 2.85A, 75mR", Part Number=994-MSS1038T-223MLC, ComponentLink1Description=Datasheet, ComponentLink2Description=Order, ComponentLink2URL=https://hu.mouser.com/en/ProductDetail/Coilcraft/MSS1038T-223MLC?qs=zCSbvcPd3pYngswiQ3YHhA%3D%3D, Supplier=Mouser, Type=IND
R1 R2 R3 R4 R5 R6 R7 R8 R9 R10 R11 R12 R13 R14 R15 R16 R17 R18 R19 R20 R21 R22 R23 R24 R25 R26 R27 R28 R29 R30 R31 R32 R33 R34 R35 R36 R37_1 R37_2 R38_1 R38_2 R39_1 R39_2 R40_1 R40_2 R41_1 R41_2 R42 R43 R44_1 R44_2 R45_1 R45_2 R46_1 R46_2 R47_1 R47_2 R48_1 R48_2 R49_1 R49_2 R50 R51 R52 R53 R54 R55 R56 R57 R58 R59 R60 R61 R62 R63 R64 R65 R66 R67 R68 R69: library part RESISTOR, "Metal Film Resistor", Type=RES
RT1 RT2: "NTC (Negative Temperature Coefficient) Thermistors 10Kohms 1%", Part Number=594-NTCS0805E3103FLT, ComponentLink1Description=Datasheet, ComponentLink2Description=Order, ComponentLink2URL=https://hu.mouser.com/en/ProductDetail/Vishay-BC-Components/NTCS0805E3103FLT?qs=%2FWiulJ9oly4Pd4lidS66Yw%3D%3D, Supplier=Mouser, Type=RES
SW1: "Tactile switch", Part Number=2065132, ComponentLink1Description=Datasheet, ComponentLink2Description=Order, ComponentLink2URL=https://hu.farnell.com/wurth-elektronik/431256031726/switch-260gf-6x6mm-r-a-3-15mm/dp/2065132, Supplier=Farnell, Type=Mechanical
T1 T3: "Power NMOSFET Dual, 60V, 17A, 36mΩ", Part Number=863-FD5877NLWFT1G-UM, ComponentLink1Description=Datasheet, ComponentLink2Description=Order, ComponentLink2URL=https://hu.mouser.com/en/ProductDetail/onsemi/NVMFD5877NLWFT1G-UM?qs=PBDs2xEllI96pZN4%2F5B02g%3D%3D, Supplier=Mouser, Type=FET
TP1 TP2_1 TP2_2: "SMD testpoint"
U1: "USB Interface IC USB Type-C and USB P ower Delivery (PD)", Part Number=595-TPS25751SRSMR, ComponentLink1Description=Datasheet, ComponentLink2Description=Order, ComponentLink2URL=https://hu.mouser.com/en/ProductDetail/Texas-Instruments/TPS25751SRSMR?qs=2wMNvWM5ZX4s3a9I%252B6VO9w%3D%3D, Supplier=Mouser, Type=IC
U2: "Battery Management I C controlled 1-4- cell 5-A buck-boost", Part Number=595-BQ25798RQMR, ComponentLink1Description=Datasheet, ComponentLink2Description=Order, ComponentLink2URL=https://hu.mouser.com/en/ProductDetail/Texas-Instruments/BQ25798RQMR?qs=ljCeji4nMDmr66dwAbNsCg%3D%3D, Supplier=Mouser, Type=IC
U3: "Battery Management 3-series to 5-series stackable", Part Number=595-BQ7791500PWR, ComponentLink1Description=Datasheet, ComponentLink2Description=Order, ComponentLink2URL=https://hu.mouser.com/en/ProductDetail/Texas-Instruments/BQ7791500PWR?qs=F5EMLAvA7IBs7uL7im8AUA%3D%3D, Supplier=Mouser, Type=IC
U4: "Switching Voltage Regulators 4.5V-to-42V 0.3A syn chronous buck conve", Part Number=595-LMR51403YDBVR, ComponentLink1Description=Datasheet, ComponentLink2Description=Order, ComponentLink2URL=https://hu.mouser.com/en/ProductDetail/Texas-Instruments/LMR51403YDBVR?qs=a2MtRaTmNOSR%252BGtnOaFIVg%3D%3D, Supplier=Mouser, Type=PWR-REG
U5 U6_1 U6_2: "Switching Voltage Regulators 4.5Vto28VInp 3A Sync Step-Down Converter A 595-TPS54335ADRCT", Part Number=595-TPS54335ADRCR, ComponentLink1Description=Datasheet, ComponentLink2Description=Order, ComponentLink2URL=https://hu.mouser.com/en/ProductDetail/Texas-Instruments/TPS54335ADRCR?qs=ADSrZYdIRCdK%252Bcxbafh6hw%3D%3D, Supplier=Mouser, Type=PWR-REG
U8: "ARM MCU, Cortex-M3, 32 bit, 72 MHz, 64 KB", Part Number=3129604, ComponentLink1Description=Datasheet, ComponentLink1URL=SGST-S-A0001117293-1.pdf, ComponentLink2Description=Order, ComponentLink2URL=https://hu.farnell.com/stmicroelectronics/stm32f103c8t6tr/mcu-32bit-72mhz-lqfp-48/dp/3129604?st=stm32f103c8t6tr, Supplier=Farnell, Type=IC
U9: "EEPROM 256kb I2C", Part Number=698-CAT24C256WI-GT3, ComponentLink1Description=Datasheet, ComponentLink2Description=Order, ComponentLink2URL=https://hu.mouser.com/en/ProductDetail/onsemi/CAT24C256WI-GT3?qs=rZgeL6XvLwaEqwp5Dppodg%3D%3D, Supplier=Mouser, Type=IC
X1: library part 16M-SMD3225, "Crystal oscillator, 16MHz, ±10ppm", Part Number=100.387.05, ComponentLink1Description=Datasheet, ComponentLink1URL=3225-12M-SR_EN_10044508.pdf, ComponentLink2Description=Order, ComponentLink2URL=https://www.hestore.hu/prod_10038705.html, Supplier=Hestore, Type=OTHER

## Via types
v1: diameter 0.61, hole 0.254, Top Layer to Bottom Layer, tented both sides, 455 vias

## Nets (pads, with @x,y where several pads share a name; then routed paths per layer and width w, separated by ;. In a path a pad name is that pad's centre, name@x,y a point inside that pad or via, vN(x,y) a via of type N, cw(c..) or ccw(c..) an arc to the next point about the centre after c; other vN are vias at no path point)
+3V3: C17.2 C18.2 C52.1 C74.2 C75.2 C76.2 C77.2 C78.2 C79.2 C80.2 C81.2 C89.2 L3.2 R2.2 R3.2 R4.2 R5.2 R43.1 R50.1 R51.2 R53.2 R56.2 R64.2 U1.32 U8.9 U8.24 U8.36 U8.48 U9.8 | length 36.3
  Top Layer w0.152: R64.2@3.429,19.558 v1(3.429,20.447) ; v1(29.845,26.67) R53.2@29.845,27.512 ; R50.1@34.671,38.147 v1(35.56,38.147) ; R51.2@34.671,39.751 v1(35.56,39.751) ; R43.1@48.006,18.288 v1(48.006,19.177) ; R56.2@59.69,38.481 v1(60.579,38.481)
  Top Layer w0.203: U1.32@110.204,30.705 C18.2@110.204,33.56
  Top Layer w0.254: C80.2@35.066,27.909 U8.9@37.721,27.909 ; U8.48@39.25,33.438 C78.2@39.25,36.093 ; C74.2@44.75,22.225 U8.24@44.75,24.88 ; U8.36@46.279,31.909 C76.2@48.934,31.909
  Top Layer w0.381: v1(38.227,19.177) C89.2@38.227,18.288 U9.8@39.878,18.288 ; v1(101.981,24.13) R3.2@101.981,24.892 ; v1(103.632,24.13) R2.2@103.632,24.892 ; R4.2@103.632,34.925 v1(103.632,35.687) ; R5.2@105.283,34.957 v1(105.283,35.719) ; C18.2@110.204,33.56 C17.2@111.887,33.56 v1(111.061,33.56)
  Top Layer w0.508: C80.2@35.066,27.909 C81.2@35.066,26.304 v1(35.828,26.304) ; v1(37.645,35.331) C79.2@37.645,36.093 C78.2@39.25,36.093 ; C74.2@44.75,22.225 C75.2@46.355,22.225 v1(46.355,22.987) ; v1(48.172,33.514) C77.2@48.934,33.514 C76.2@48.934,31.909
  other v1: 35.56,87.884 36.576,87.884 35.56,88.9 36.576,88.9 35.56,89.789 36.576,89.789
+5V: C15.2 C16.2 C59.1 C90.2 C91.2 L4.2 L6.2 U1.28 U1.29
+5VLOC_1: C68_1.1 C88_1.2 IC2_1.1 IC2_1.4 IC2_1.6 IC2_1.7 IC2_1.8 L8_1.2 L9_1.2 R47_1.2 R48_1.2 R49_1.2 | length 41.4
  Top Layer w0.152: v1(100.685,59.141) IC2_1.4@100.685,60.698 ; IC2_1.6@101.985,59.898 101.985,59.26 102.108,59.137 102.362,59.137 102.485,59.26 ; IC2_1.7@102.485,59.898 102.485,59.26 ; R49_1.2@102.882,57.549 v1(103.847,57.549) ; IC2_1.8@102.985,59.898 102.985,59.26 102.862,59.137 102.608,59.137 102.485,59.26 ; 102.997,59.264 103.12,59.141 v1(103.847,59.141) ; R48_1.2@104.712,66.82 v1(105.676,66.82) ; R47_1.2@107.505,60.153 v1(108.47,60.153)
  Bottom Layer w0.254: v1(96.901,62.611) 96.901,66.421 97.345,66.865 105.676,66.865 108.141,66.865 108.496,66.51 108.496,60.743 108.496,59.474 108.208,59.186 103.847,59.186 103.847,57.594 102.277,57.594 v1@100.685,59.186
+5VLOC_2: C68_2.1 C88_2.2 IC2_2.1 IC2_2.4 IC2_2.6 IC2_2.7 IC2_2.8 L8_2.2 L9_2.2 R47_2.2 R48_2.2 R49_2.2 | length 41.4
  Top Layer w0.152: v1(100.685,80.141) IC2_2.4@100.685,81.698 ; IC2_2.6@101.985,80.898 101.985,80.26 102.108,80.137 102.362,80.137 102.485,80.26 ; IC2_2.7@102.485,80.898 102.485,80.26 ; R49_2.2@102.882,78.549 v1(103.847,78.549) ; IC2_2.8@102.985,80.898 102.985,80.26 102.862,80.137 102.608,80.137 102.485,80.26 ; 102.997,80.264 103.12,80.141 v1(103.847,80.141) ; R48_2.2@104.712,87.82 v1(105.676,87.82) ; R47_2.2@107.505,81.153 v1(108.47,81.153)
  Bottom Layer w0.254: v1(96.901,83.566) 96.901,87.376 97.345,87.82 v1(105.676,87.82) 108.141,87.82 108.496,87.465 108.496,81.698 108.496,80.429 108.208,80.141 v1(103.847,80.141) v1(103.847,78.549) 102.277,78.549 v1(100.685,80.141)
A0: R60.2 U9.1 | length 2.7
  Top Layer w0.152: R60.2@39.497,9.906 39.497,10.795 39.878,11.176 U9.1@39.878,12.446
A1: R61.2 U9.2 | length 2.5
  Top Layer w0.152: R61.2@41.148,9.906 U9.2@41.148,12.446
A2: R62.2 U9.3 | length 2.7
  Top Layer w0.152: U9.3@42.418,12.446 42.418,11.176 42.799,10.795 R62.2@42.799,9.906
ALI: R54.1 U8.12 | length 5.8
  Top Layer w0.152: R54.1@35.052,23.241 37.587,23.241 37.721,23.375 U8.12@37.721,26.409
AVDD: C43.2 U3.2 | length 7
  Top Layer w0.381: U3.2@23.925,57.485 23.925,59.485 24.384,59.944 C43.2@28.702,59.944
BAT: BH1.2 BH1.4 C34.2 C35.2 C87.2 C92.2 R12.1 R13.2 R14.1 R15.1 U2.22 U2.23 | length 194.1
  Top Layer w0.152: v1(23.287,46.106) R15.1@23.287,46.995 ; R14.1@29.967,66.306 v1(30.856,66.306) ; R12.1@86.281,24.511 v1(86.281,25.4)
  Top Layer w0.381: v1(64.135,26.162) v1(64.135,66.421)
  Top Layer w0.508: R13.2@32.639,57.485 v1(33.401,57.485)
  Bottom Layer w0.152: v1(23.287,46.106) 32.39,46.106 33.401,47.117 v1(33.401,57.485) ; v1@30.856,66.294 32.955,66.294 33.401,65.848 ; 78.613,25.781 78.994,26.162 86.106,26.162 86.281,25.987 v1(86.281,25.4)
  Bottom Layer w0.381: v1(33.401,57.485) 33.401,65.848 33.974,66.421 v1(64.135,66.421) ; v1(64.135,26.162) 78.232,26.162 78.613,25.781 v1(78.613,16.383)
  Bottom Layer w2.286: 78.613,13.038 78.613,4.041 80.622,2.032 90.341,2.032 92.35,4.041 ; BH1.2@92.35,8.8 92.35,4.041 ; BH1.4@111.65,8.8 111.65,4.041 109.641,2.032 94.359,2.032 92.35,4.041
  other v1: 77.216,14.605 78.613,14.605 80.01,14.605 77.216,15.494 78.613,15.494 80.01,15.494 77.216,16.383 80.01,16.383
BATP: R12.2 U2.18 | length 8.3
  Top Layer w0.152: R12.2@86.281,23.114 89.166,20.229 89.166,17.366 89.3,17.232 U2.18@90.491,17.232
BP_GND: BH3.1 BH3.3 C39.1 C40.2 C41.1 C42.1 C43.1 C44.1 C45.1 R18.1 R20.1 R26.1 R57.1 RT2.1 U3.9 U3.16 U3.20 U3.23 U3.24 | length 69.5
  Top Layer w0.152: R26.1@11.43,72.136 11.43,69.273 11.564,69.139 17.602,69.139 18.542,68.199 18.542,66.315 19.098,65.758 R57.1@19.098,65.151 ; C45.1@16.304,62.23 v1(16.304,63.04) ; v1(19.443,46.106) R18.1@19.443,46.995 ; C44.1@20.495,62.23 v1(20.495,63.04) ; R20.1@29.972,71.247 v1(30.861,71.247)
  Top Layer w0.381: U3.16@19.375,51.735 v1(19.375,53.269) ; v1(19.375,55.951) U3.9@19.375,57.485 ; C40.2@20.864,67.691 v1(20.864,68.516) ; U3.20@21.975,51.735 v1(21.975,53.269) ; C39.1@22.515,67.691 v1(22.515,68.516) ; U3.23@23.925,51.735 v1(23.925,53.269) ; v1(24.575,50.2) U3.24@24.575,51.735
  Top Layer w0.508: v1(26.162,55.263) C41.1@26.162,56.088 ; v1(27.94,52.913) C42.1@27.94,53.739 ; C43.1@27.94,63.69 v1(27.94,64.516) ; v1(29.464,52.913) C42.1@29.464,53.739 ; C43.1@29.464,63.69 v1(29.464,64.516)
  Bottom Layer w0.152: BH3.3@30.65,85.2 30.65,77.046 30.861,76.835 v1(30.861,71.247)
  Bottom Layer w0.508: RT2.1@7.239,88.011 9.104,88.011 11.35,85.765 BH3.1@11.35,85.2
  Bottom Layer w2.54: BH3.1@11.35,85.2 BH3.3@30.65,85.2
  other v1: 9.953,75.057 11.35,75.057 12.747,75.057 9.953,75.946 11.35,75.946 12.747,75.946 9.953,76.835 11.35,76.835 12.747,76.835
BTST1: C27.2 U2.4 | length 2.7
  Top Layer w0.152: U2.4@94.266,16.032 95.074,16.032 95.679,16.637 C27.2@96.695,16.637
BTST2: C32.1 U2.19 | length 2.4
  Top Layer w0.152: C32.1@88.164,17.018 88.796,17.018 88.982,16.832 U2.19@90.506,16.832
C\E\: R36.1 U2.13 U8.26 | length 64.6
  Top Layer w0.152: U8.26@46.279,26.909 47.737,26.909 47.879,27.051 v1(55.753,27.051) ; U2.13@92.166,18.332 92.166,18.829 91.774,19.221 91.774,20.225 v1(93.012,21.463) 93.012,22.012 93.3,22.3 93.698,22.3 R36.1@94.5,23.102
  Bottom Layer w0.152: v1(55.753,27.051) 57.277,27.051 61.214,30.988 61.595,30.988 93.012,30.988 93.4,30.6 93.4,21.851 v1(93.012,21.463)
CHRG1: R65.1 U8.17 | length 39.7
  Top Layer w0.152: R65.1@7.397,26 8.124,25.273 23.622,25.273 27.788,21.107 v1(30.428,21.107) ; v1(41.25,21.107) U8.17@41.25,24.88
  Bottom Layer w0.152: v1(30.428,21.107) v1(41.25,21.107)
CHRG2: R66.1 U8.16 | length 40.9
  Top Layer w0.152: R66.1@7.397,29 8.338,29 8.509,28.829 8.509,26.416 9.017,25.908 23.622,25.908 27.813,21.717 v1(31.038,21.717) ; v1(40.64,21.717) 40.64,23.114 40.75,23.224 U8.16@40.75,24.88
  Bottom Layer w0.152: v1(31.038,21.717) v1(40.64,21.717)
CHRG3: R67.1 U8.15 | length 42
  Top Layer w0.152: R67.1@7.397,32 8.894,32 9.144,31.75 9.144,27.051 9.652,26.543 23.622,26.543 27.838,22.327 v1(30.428,22.327) ; v1(40.03,22.327) 40.03,23.266 40.25,23.486 U8.15@40.25,24.88
  Bottom Layer w0.152: v1(30.428,22.327) v1(40.03,22.327)
CHRG4: R68.1 U8.14 | length 43.3
  Top Layer w0.152: R68.1@7.397,35 9.45,35 9.779,34.671 9.779,27.559 10.16,27.178 23.622,27.178 27.863,22.937 v1(31.038,22.937) ; v1(39.42,22.937) 39.42,23.545 39.75,23.875 U8.14@39.75,24.88
  Bottom Layer w0.152: v1(31.038,22.937) v1(39.42,22.937)
EN_1: IC2_1.5 R49_1.1 U8.45 | length 86.9
  Top Layer w0.152: v1(40.64,53.594) 40.64,39.243 40.513,39.116 40.513,35.179 40.75,34.942 U8.45@40.75,33.438 ; v1(100.52,57.549) R49_1.1@101.485,57.549 IC2_1.5@101.485,59.898
  Bottom Layer w0.152: v1(40.64,53.594) 45.094,53.594 99.568,53.594 100.52,54.546 v1(100.52,57.549)
EN_2: IC2_2.5 R49_2.1 U8.46 | length 98.8
  Top Layer w0.152: v1(40.005,61.087) 40.005,34.925 40.25,34.68 U8.46@40.25,33.438 ; v1(100.52,78.549) R49_2.1@101.485,78.549 IC2_2.5@101.485,80.898
  Bottom Layer w0.152: v1(40.005,61.087) 63.5,61.087 76.962,74.549 96.52,74.549 v1(100.52,78.549)
F\A\U\L\T\_1: IC2_1.13 R48_1.1 U8.41 | length 98.7
  Top Layer w0.152: U8.41@42.75,33.438 42.75,34.838 43.712,35.8 v1(43.712,54.229) ; IC2_1.13@102.985,62.998 102.985,64.073 103.128,64.216 104.525,64.216 104.712,64.403 R48_1.1@104.712,65.423 v1(105.676,65.423)
  Bottom Layer w0.152: v1@43.688,54.229 44.958,54.229 45.357,54.229 99.187,54.229 99.822,54.864 99.822,64.979 100.266,65.423 v1(105.676,65.423)
F\A\U\L\T\_2: IC2_2.13 R48_2.1 U8.38 | length 108.5
  Top Layer w0.152: U8.38@44.25,33.438 44.25,34.217 45.593,35.56 v1(45.593,61.722) ; IC2_2.13@102.985,83.998 102.985,85.073 103.128,85.216 104.525,85.216 104.712,85.403 R48_2.1@104.712,86.423 v1(105.676,86.423)
  Bottom Layer w0.152: v1(45.593,61.722) 63.246,61.722 76.581,75.057 96.393,75.057 99.822,78.486 99.822,85.979 100.266,86.423 v1(105.676,86.423)
GATE_VBUS: T1.4 U1.21 | length 15.8
  Top Layer w0.152: U1.21@108.404,27.305 108.404,25.041 v1(108.966,24.479) ; v1(120.015,24.114) T1.4@120.016,23.225 T1.4@120.016,23.225
  Bottom Layer w0.152: v1(108.966,24.479) 110.077,24.479 110.871,25.273 112.141,25.273 113.3,24.114 v1(120.015,24.114)
GATE_VSYS: T1.2 U1.20 | length 18.4
  Top Layer w0.152: v1(108.004,24.479) U1.20@108.004,27.305 ; T1.2@120.016,20.685 v1(121.031,20.685)
  Bottom Layer w0.152: v1(108.004,24.479) 108.734,23.749 109.855,23.749 111.633,21.971 119.745,21.971 v1(121.031,20.685)